# EAGLE board Doppler_LED_Controller-Panel (EAGLE 9.1.3), part 1 of 3
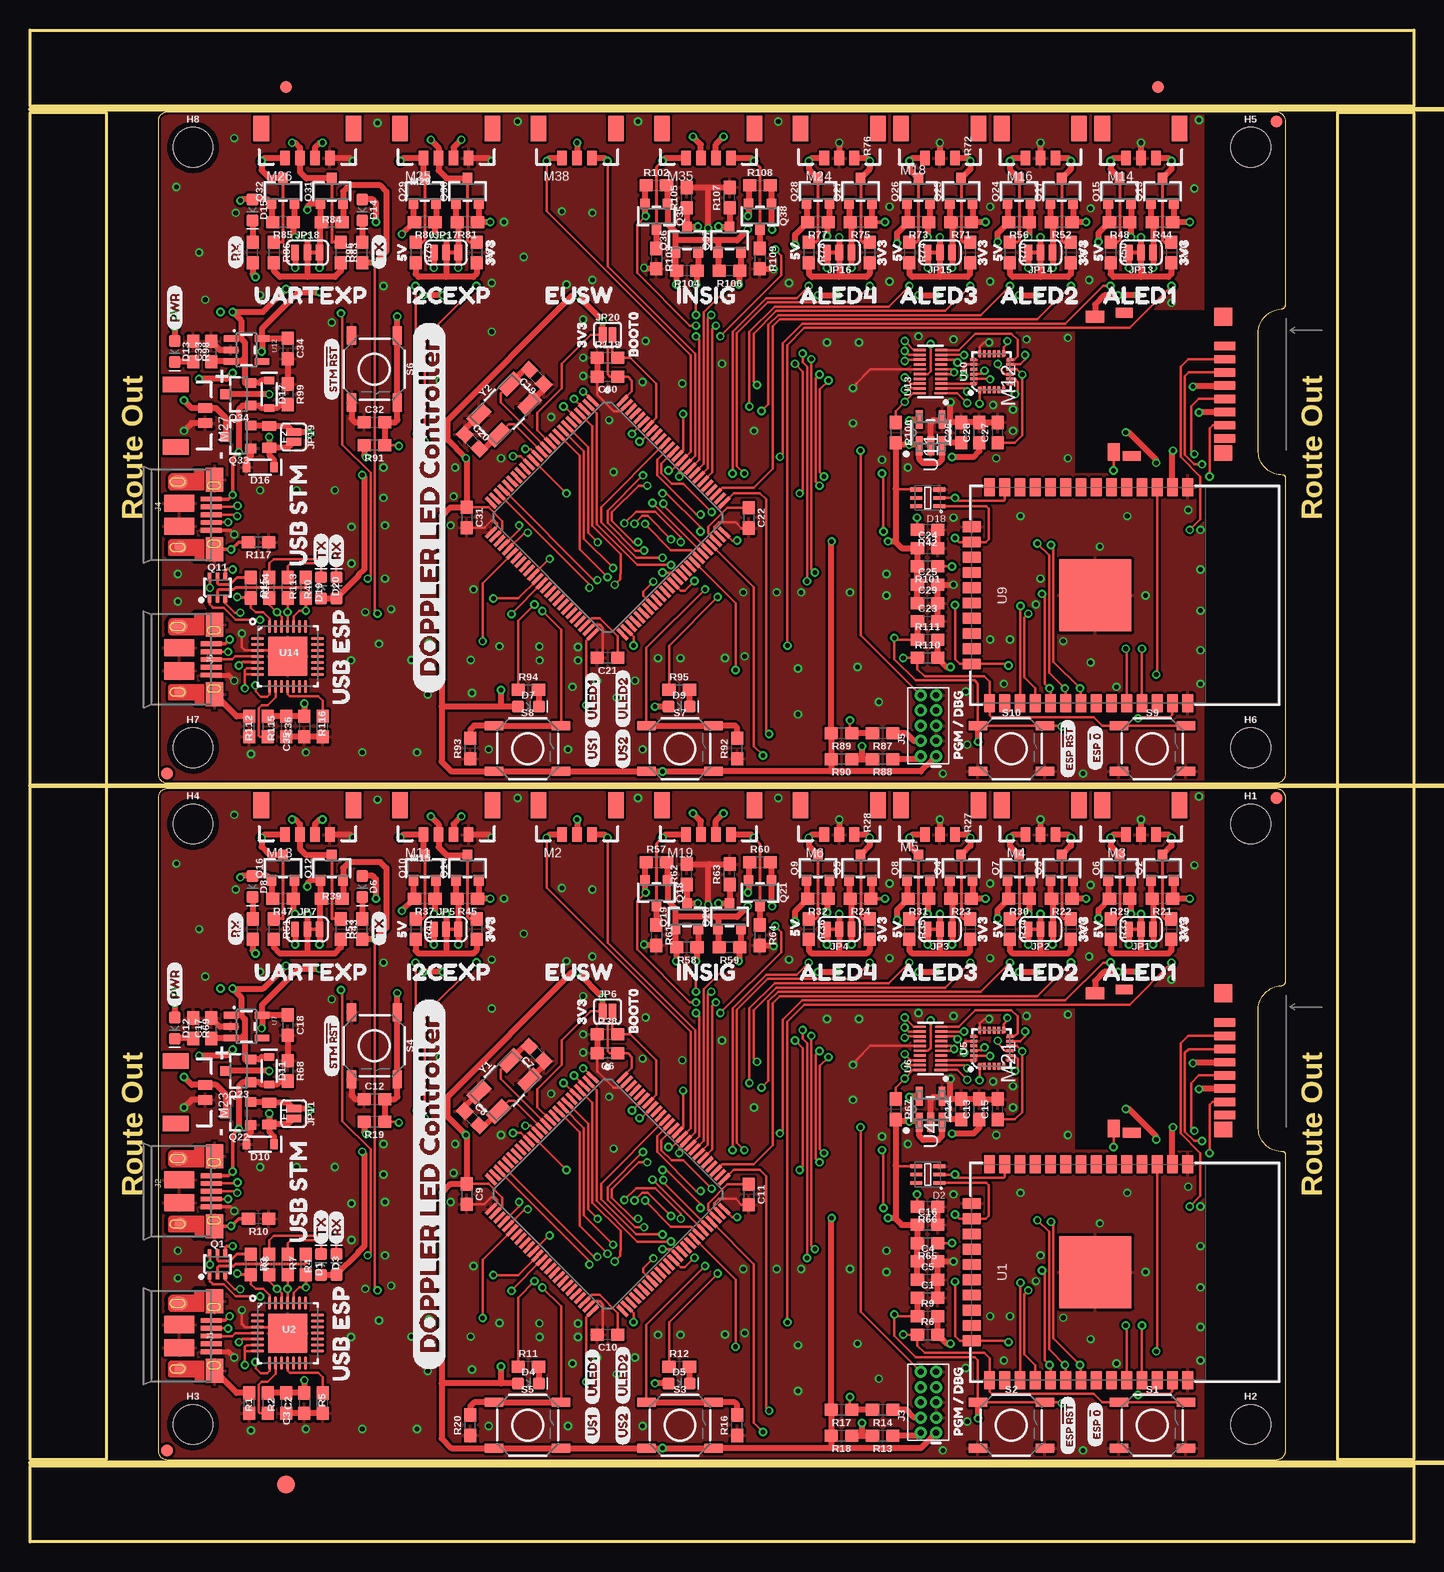
[diagram p0: board, top side]
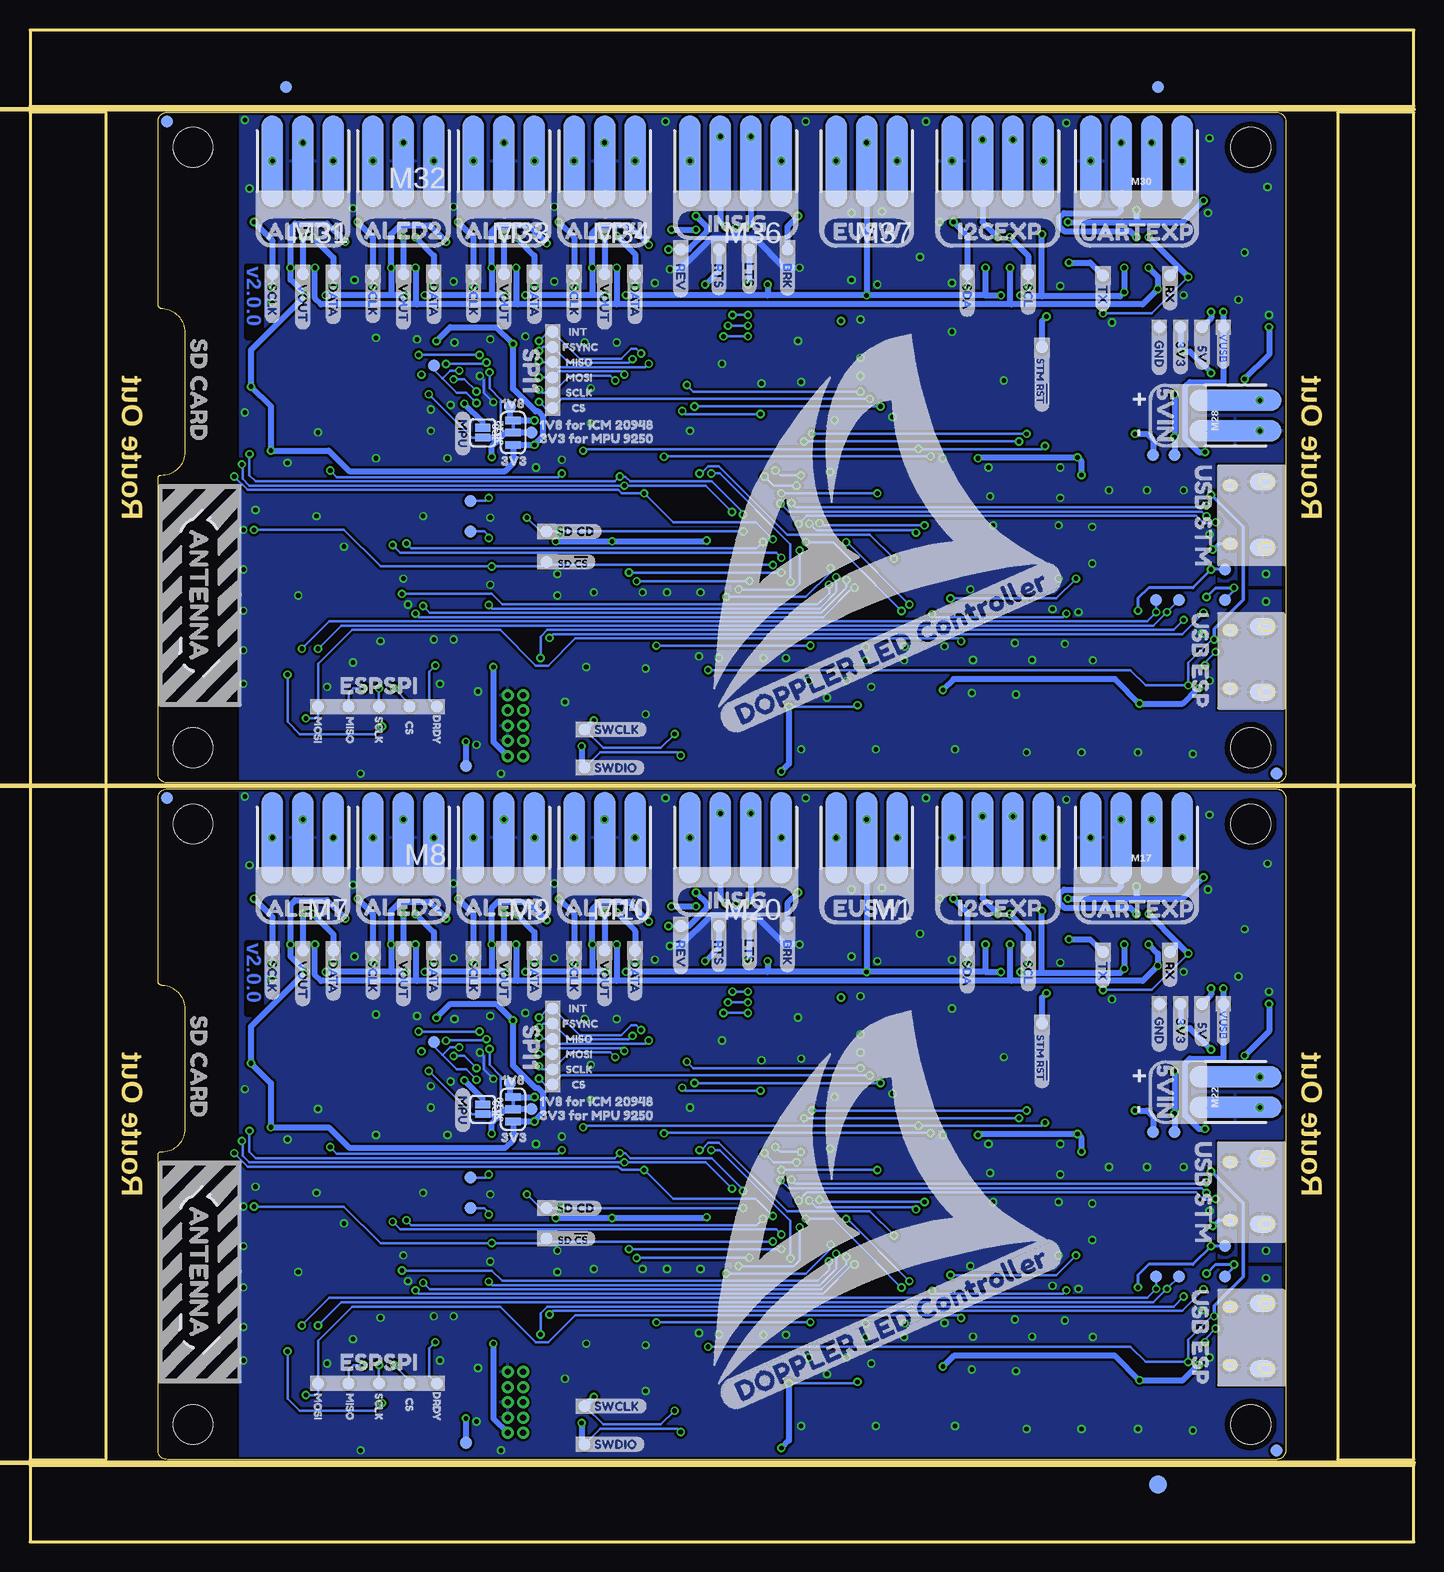
[diagram p1: board, bottom side, seen from below]

Size 115.32 x 125.98 mm. Coordinates in mm from the lower left corner, seen from the top.
Outline: 11.43,6.86 103.89,6.86 arc90 104.65,7.62 104.65,32.26 arc90 104.39,32.51 arc-90 102.36,34.42 102.36,44.2 arc-90 104.27,46.35 arc90 104.65,46.74 104.65,61.98 arc90 103.89,62.74 11.43,62.74 arc90 10.67,61.98 10.67,7.62 arc90 11.43,6.86
Outline: 11.43,63.25 103.89,63.25 arc90 104.65,64.01 104.65,88.65 arc90 104.39,88.9 arc-90 102.36,90.81 102.36,100.58 arc-90 104.27,102.74 arc90 104.65,103.12 104.65,118.36 arc90 103.89,119.13 11.43,119.13 arc90 10.67,118.36 10.67,64.01 arc90 11.43,63.25
Outline: 0,6.35 115.32,6.35 115.32,0 0,0 0,6.35
Outline: 108.97,119.13 115.32,119.13 115.32,6.86 108.97,6.86 108.97,119.13
Outline: 0,125.98 115.32,125.98 115.32,119.63 0,119.63 0,125.98
Outline: 0,119.13 6.35,119.13 6.35,6.86 0,6.86 0,119.13
Copper layers (1*16): Top 0.035mm / dielectric 1.5mm / Bottom 0.035mm
Design rules "SparkFun-2-layer-PCBWay-LIMIT": minimum track width 6mil, minimum drill 0.3mm, track to track 6mil, track to pad 6mil, pad to pad 6mil, via to via 6mil, smd to smd 6mil, copper to edge 6mil, drill to drill 6mil, minimum pad ring 6mil, minimum via ring 6mil, stop-mask expansion 4mil, vias tented up to drill 25mil, thermal gap 10mil
Milling: 3 lines

## Footprints (pad centres in the part's own frame; a part is rotated, then mirrored left to right if it is on the bottom)
0603 = smd 1.1 x 1: 1 -0.85,0; 2 0.85,0
LED-0603 = smd 1 x 1: A -0.877,0; C 0.877,0
APA102_2020_LONG = smd 1 x 0.3: 1DIN -0.95,0.7; 2CIN -0.95,0; 5COUT 0.95,0; 6DOUT 0.95,0.7 | smd 1 x 0.35: 3GND -0.95,-0.7; 4VCC 0.95,-0.7
SOD-323 = smd 0.63 x 0.83: A 1.15,0; C -1.15,0
FIDUCIAL-1X2 = smd 1 x 1: 1 0,0
FIDUCIAL-1.5X3 = smd 1.5 x 1.5: 1 0,0
0805 = smd 0.8 x 1.2: 1 -0.9,0; 2 0.9,0
STAND-OFF = hole 3.302: 0,0
USB-MICROB-PTH-MILL = smd 0.4 x 1.75: D+ 0,0; D- -0.65,0; GND 1.3,0; ID 0.65,0; VBUS -1.3,0 | smd 2 x 1.46: SHIELD -2.9,0.275; SHIELD2 2.9,0.275 | smd 1.425 x 2.5: SHIELD3 -0.963,-2.675; SHIELD4 0.963,-2.675 | smd 1.4 x 2.1 bottom: SHIELD5 -2.731,-2.531; SHIELD7 2.729,-2.531 | smd 1 x 1: SHIELD6 2.7,-2.575 | smd 1.1 x 1.5: SHIELD8 -2.731,-2.731 | smd 1 x 1.3 bottom: SHIELD9 -2.43,0.195; SHIELD10 2.43,0.195
2X5-PTH-1.27MM = drill 0.508 pad 1: 1 -2.54,-0.635; 2 -2.54,0.635; 3 -1.27,-0.635; 4 -1.27,0.635; 5 0,-0.635; 6 0,0.635; 7 1.27,-0.635; 8 1.27,0.635; 9 2.54,-0.635; 10 2.54,0.635
SMT-JUMPER_3_1-NC_TRACE_SILK = smd 0.635 x 1.27: 1 -1.016,0; 2 0,0; 3 1.016,0
SMT-JUMPER_2_NO_SILK = smd 0.635 x 1.27: 1 -0.406,0; 2 0.406,0
1X03_SMD_0.1IN = smd 1.778 x 7.62: P$1 -2.54,0; P$2 0,0; P$3 2.54,0
3_PIN_LOCK = smd 1.3 x 2.15: MOUNT0 -3.225,2.46; MOUNT1 3.225,2.46 | smd 0.8 x 1.2: P$1 -1.25,0; P$2 0,0; P$3 1.25,0
4_PIN_LOCK = smd 1.3 x 2.15: MOUNT0 -4.475,2.46; MOUNT1 3.225,2.46 | smd 0.8 x 1.2: P$1 -2.5,0; P$2 -1.25,0; P$3 0,0; P$4 1.25,0
SD_AMPHENOL_PUSH_PULL = smd 1.45 x 1: CD_SW1 -1.125,8.35 | smd 1 x 1.55: CD_SW2 10.15,9.925 | smd 1.3 x 1.5: NC_MOUNT1 -1.2,-0.75 | smd 1.5 x 1.5: NC_MOUNT2 10.15,-0.75 | smd 0.8 x 1.5: NC_MOUNT3 -1.475,6.85 | smd 0.8 x 1.4: NC_MOUNT4 10.475,7.5 | smd 0.7 x 1.75: P$1 7.7,-0.875; P$2 6.6,-0.875; P$3 5.5,-0.875; P$4 4.4,-0.875; P$5 3.3,-0.875; P$6 2.2,-0.875; P$7 1.1,-0.875; P$8 0,-0.875
1X04_SMD_0.1IN = smd 1.778 x 7.62: P$1 -3.81,0; P$2 -1.27,0; P$3 1.27,0; P$4 3.81,0
1X02_SMD_0.1IN = smd 1.778 x 7.62: P$1 -1.27,0; P$2 1.27,0
2_PIN_LOCK = smd 1.3 x 2.15: MOUNT0 -1.975,2.46; MOUNT1 3.225,2.46 | smd 0.8 x 1.2: P$2 0,0; P$3 1.25,0
SC70-6 = smd 0.3 x 0.66: 1 -0.65,-0.92; 2 0,-0.92; 3 0.65,-0.92; 4 0.65,0.92; 5 0,0.92; 6 -0.65,0.92
SOT23-3 = smd 0.8 x 0.9: 1 -0.95,-1; 2 0.95,-1; 3 0,1.1
TACTILE_SWITCH_SMD_5.2MM = smd 1.524 x 0.762: 1 -2.794,1.905; 2 2.794,1.905; 3 -2.794,-1.905; 4 2.794,-1.905
PAD.03X.04 = smd 1.016 x 1.016: P$1 0,0
ESP-WROOM-32 = smd 0.9 x 1.5: 1 7.7,9; 2 6.43,9; 3 5.16,9; 4 3.89,9; 5 2.62,9; 6 1.35,9; 7 0.08,9; 8 -1.19,9; 9 -2.46,9; 10 -3.73,9; 11 -5,9; 12 -6.27,9; 13 -7.54,9; 14 -8.81,9; 25 -8.81,-9; 26 -7.54,-9; 27 -6.27,-9; 28 -5,-9; 29 -3.73,-9; 30 -2.46,-9; 31 -1.19,-9; 32 0.08,-9; 33 1.35,-9; 34 2.62,-9; 35 3.89,-9; 36 5.16,-9; 37 6.43,-9; 38 7.7,-9 | smd 1.5 x 0.9: 15 -10.3,5.715; 16 -10.3,4.445; 17 -10.3,3.175; 18 -10.3,1.905; 19 -10.3,0.635; 20 -10.3,-0.635; 21 -10.3,-1.905; 22 -10.3,-3.175; 23 -10.3,-4.445; 24 -10.3,-5.715 | smd 6 x 6: GND 0,0
VQFN-28 = smd 1.1 x 0.25: 1 -2.5,1.5; 2 -2.5,1; 3 -2.5,0.5; 4 -2.5,0; 5 -2.5,-0.5; 6 -2.5,-1; 7 -2.5,-1.5; 15 2.5,-1.5; 16 2.5,-1; 17 2.5,-0.5; 18 2.5,0; 19 2.5,0.5; 20 2.5,1; 21 2.5,1.5 | smd 0.25 x 1.1: 8 -1.5,-2.5; 9 -1,-2.5; 10 -0.5,-2.5; 11 0,-2.5; 12 0.5,-2.5; 13 1,-2.5; 14 1.5,-2.5; 22 1.5,2.5; 23 1,2.5; 24 0.5,2.5; 25 0,2.5; 26 -0.5,2.5; 27 -1,2.5; 28 -1.5,2.5 | smd 3.25 x 3.25: PAD 0,0
LQFP-100 = smd 0.3 x 1.2: P$1 -6,-7.75; P$2 -5.5,-7.75; P$3 -5,-7.75; P$4 -4.5,-7.75; P$5 -4,-7.75; P$6 -3.5,-7.75; P$7 -3,-7.75; P$8 -2.5,-7.75; P$9 -2,-7.75; P$10 -1.5,-7.75; P$11 -1,-7.75; P$12 -0.5,-7.75; P$13 0,-7.75; P$14 0.5,-7.75; P$15 1,-7.75; P$16 1.5,-7.75; P$17 2,-7.75; P$18 2.5,-7.75; P$19 3,-7.75; P$20 3.5,-7.75; P$21 4,-7.75; P$22 4.5,-7.75; P$23 5,-7.75; P$24 5.5,-7.75; P$25 6,-7.75; P$51 6,7.75; P$52 5.5,7.75; P$53 5,7.75; P$54 4.5,7.75; P$55 4,7.75; P$56 3.5,7.75; P$57 3,7.75; P$58 2.5,7.75; P$59 2,7.75; P$60 1.5,7.75; P$61 1,7.75; P$62 0.5,7.75; P$63 0,7.75; P$64 -0.5,7.75; P$65 -1,7.75; P$66 -1.5,7.75; P$67 -2,7.75; P$68 -2.5,7.75; P$69 -3,7.75; P$70 -3.5,7.75; P$71 -4,7.75; P$72 -4.5,7.75; P$73 -5,7.75; P$74 -5.5,7.75; P$75 -6,7.75 | smd 1.2 x 0.3: P$26 7.75,-6; P$27 7.75,-5.5; P$28 7.75,-5; P$29 7.75,-4.5; P$30 7.75,-4; P$31 7.75,-3.5; P$32 7.75,-3; P$33 7.75,-2.5; P$34 7.75,-2; P$35 7.75,-1.5; P$36 7.75,-1; P$37 7.75,-0.5; P$38 7.75,0; P$39 7.75,0.5; P$40 7.75,1; P$41 7.75,1.5; P$42 7.75,2; P$43 7.75,2.5; P$44 7.75,3; P$45 7.75,3.5; P$46 7.75,4; P$47 7.75,4.5; P$48 7.75,5; P$49 7.75,5.5; P$50 7.75,6; P$76 -7.75,6; P$77 -7.75,5.5; P$78 -7.75,5; P$79 -7.75,4.5; P$80 -7.75,4; P$81 -7.75,3.5; P$82 -7.75,3; P$83 -7.75,2.5; P$84 -7.75,2; P$85 -7.75,1.5; P$86 -7.75,1; P$87 -7.75,0.5; P$88 -7.75,0; P$89 -7.75,-0.5; P$90 -7.75,-1; P$91 -7.75,-1.5; P$92 -7.75,-2; P$93 -7.75,-2.5; P$94 -7.75,-3; P$95 -7.75,-3.5; P$96 -7.75,-4; P$97 -7.75,-4.5; P$98 -7.75,-5; P$99 -7.75,-5.5; P$100 -7.75,-6
DDC5 = smd 1.575 x 0.559: 1 -1.092,0.95; 2 -1.092,0; 3 -1.092,-0.95; 4 1.092,-0.95; 5 1.092,0.95
QFN24-3X3 = smd 0.495 x 0.25: 1 -1.552,1; 6 -1.552,-1; 13 1.552,-1; 18 1.552,1 | smd 0.6 x 0.25: 2 -1.5,0.6; 3 -1.5,0.2; 4 -1.5,-0.2; 5 -1.5,-0.6; 14 1.5,-0.6; 15 1.5,-0.2; 16 1.5,0.2; 17 1.5,0.6 | smd 0.25 x 0.495: 7 -1,-1.552; 12 1,-1.552; 19 1,1.552; 24 -1,1.552 | smd 0.25 x 0.6: 8 -0.6,-1.5; 9 -0.2,-1.5; 10 0.2,-1.5; 11 0.6,-1.5; 20 0.6,1.5; 21 0.2,1.5; 22 -0.2,1.5; 23 -0.6,1.5
UFDFN-20 = smd 0.2 x 1.1: 1 -1.8,-0.85 | smd 0.2 x 1: 2 -1.4,-0.9; 3 -1,-0.9; 4 -0.6,-0.9; 5 -0.2,-0.9; 6 0.2,-0.9; 7 0.6,-0.9; 8 1,-0.9; 9 1.4,-0.9; 10 1.8,-0.9; 11 1.8,0.9; 12 1.4,0.9; 13 1,0.9; 14 0.6,0.9; 15 0.2,0.9; 16 -0.2,0.9; 17 -0.6,0.9; 18 -1,0.9; 19 -1.4,0.9; 20 -1.8,0.9
SOT23-5 = smd 0.55 x 1.2: 1 -0.95,-1.3; 2 0,-1.3; 3 0.95,-1.3; 4 0.95,1.3; 5 -0.95,1.3
CRYSTAL-SMD-5X3.2-4PAD = smd 1.9 x 1.1: 1 -1.85,-1.15; 2 1.85,-1.15; 3 1.85,1.15; 4 -1.85,1.15

## Placement (x,y rotation side)
C1  0.1uF  [0603]  74.8,20.32 0 top
C2  2.2uF  [0603]  21.34,11.56 270 top
C3  0.1uF  [0603]  22.86,11.56 270 top
C4  0.1uF  [0603]  74.8,23.37 0 top
C5  10uF  [0603]  74.8,21.84 0 top
C6  0.1uF  [0603]  48.13,40.72 180 top
C7  18pF  [0603]  42.22,40.68 135 top
C8  18pF  [0603]  36.83,35.29 315 top
C9  10uF  [0603]  36.39,28.97 270 top
C10  2.2uF  [0603]  48.13,17.27 180 top
C11  2.2uF  [0603]  59.88,28.94 270 top
C12  0.1uF  [0603]  28.7,36.89 0 top
C13  0.1uF  [0603]  79.12,36.04 90 top
C14  0.1uF  [0603]  77.6,36.04 90 top
C15  0.1uF  [0603]  80.65,36.04 90 top
C16  0.1uF  [0603]  74.8,26.42 0 top
C17  2.2uF  [0603]  15.11,42.8 90 top
C18  2.2uF  [0603]  21.46,43.05 270 top
C19  18pF  [0603]  42.22,97.07 135 top
C20  18pF  [0603]  36.83,91.68 315 top
C21  2.2uF  [0603]  48.13,73.66 180 top
C22  2.2uF  [0603]  59.88,85.33 270 top
C23  0.1uF  [0603]  74.8,76.71 0 top
C24  0.1uF  [0603]  74.8,82.8 0 top
C25  0.1uF  [0603]  74.8,79.76 0 top
C26  0.1uF  [0603]  77.6,92.43 90 top
C27  0.1uF  [0603]  80.65,92.43 90 top
C28  0.1uF  [0603]  79.12,92.43 90 top
C29  10uF  [0603]  74.8,78.23 0 top
C30  0.1uF  [0603]  48.13,97.1 180 top
C31  10uF  [0603]  36.39,85.36 270 top
C32  0.1uF  [0603]  28.7,93.28 0 top
C33  2.2uF  [0603]  15.11,99.19 90 top
C34  2.2uF  [0603]  21.46,99.44 270 top
C35  0.1uF  [0603]  22.86,67.95 270 top
C36  2.2uF  [0603]  21.34,67.95 270 top
D1  ESPTX-GREEN  [LED-0603]  24.26,23.11 90 top
D2  ESP_STAT  [APA102_2020_LONG]  74.8,30.61 180 top
D3  ESPRX-YELLOW  [LED-0603]  25.53,23.11 90 top
D4  ULED1-BLUE  [LED-0603]  41.53,13.21 0 top
D5  ULED2-WHITE  [LED-0603]  54.1,13.21 0 top
D6  U7TX-GREEN  [LED-0603]  27.69,54.61 270 top
D7  ULED1-BLUE  [LED-0603]  41.53,69.6 0 top
D8  U7RX-YELLOW  [LED-0603]  18.54,54.61 270 top
D9  ULED2-WHITE  [LED-0603]  54.1,69.6 0 top
D10  5.6V  [SOD-323]  19.18,33.15 180 top
D11  3A/10V/280mV  [SOD-323]  19.94,39.24 270 top
D12  PWR-RED  [LED-0603]  12.06,42.8 270 top
D13  PWR-RED  [LED-0603]  12.06,99.19 270 top
D14  U7TX-GREEN  [LED-0603]  27.69,111 270 top
D15  U7RX-YELLOW  [LED-0603]  18.54,111 270 top
D16  5.6V  [SOD-323]  19.18,89.54 180 top
D17  3A/10V/280mV  [SOD-323]  19.94,95.63 270 top
D18  ESP_STAT  [APA102_2020_LONG]  74.8,87 180 top
D19  ESPTX-GREEN  [LED-0603]  24.26,79.5 90 top
D20  ESPRX-YELLOW  [LED-0603]  25.53,79.5 90 top
E$1  [FIDUCIAL-1X2]  21.34,121.22 0 top
E$2  [FIDUCIAL-1X2]  21.34,121.22 0 bottom
E$3  [FIDUCIAL-1X2]  93.98,121.22 0 top
E$4  [FIDUCIAL-1X2]  93.98,121.22 0 bottom
E$5  [FIDUCIAL-1.5X3]  21.34,4.76 0 top
E$6  [FIDUCIAL-1.5X3]  21.34,4.76 0 bottom
F1  PPTC_6V500MA  [0805]  19.94,35.69 270 top
F2  PPTC_6V500MA  [0805]  19.94,92.08 270 top
FD1  FIDUCIAL1X2  [FIDUCIAL-1X2]  11.43,7.62 0 top
FD2  FIDUCIAL1X2  [FIDUCIAL-1X2]  103.89,61.98 0 top
FD3  FIDUCIAL1X2  [FIDUCIAL-1X2]  11.43,7.62 0 bottom
FD4  FIDUCIAL1X2  [FIDUCIAL-1X2]  103.89,61.98 0 bottom
FD5  FIDUCIAL1X2  [FIDUCIAL-1X2]  11.43,64.01 0 top
FD6  FIDUCIAL1X2  [FIDUCIAL-1X2]  103.89,118.36 0 top
FD7  FIDUCIAL1X2  [FIDUCIAL-1X2]  11.43,64.01 0 bottom
FD8  FIDUCIAL1X2  [FIDUCIAL-1X2]  103.89,118.36 0 bottom
H1  STAND-OFF  [STAND-OFF]  101.73,59.82 0 top
H2  STAND-OFF  [STAND-OFF]  101.73,9.78 0 top
H3  STAND-OFF  [STAND-OFF]  13.59,9.78 0 top
H4  STAND-OFF  [STAND-OFF]  13.59,59.82 0 top
H5  STAND-OFF  [STAND-OFF]  101.73,116.2 0 top
H6  STAND-OFF  [STAND-OFF]  101.73,66.17 0 top
H7  STAND-OFF  [STAND-OFF]  13.59,66.17 0 top
H8  STAND-OFF  [STAND-OFF]  13.59,116.2 0 top
J1  [USB-MICROB-PTH-MILL]  15.11,17.14 270 top
J2  [USB-MICROB-PTH-MILL]  15.11,29.21 270 top
J3  CORTEX_DEBUG_PTH  [2X5-PTH-1.27MM]  74.87,11.62 90 top
J4  [USB-MICROB-PTH-MILL]  15.11,85.6 270 top
J5  CORTEX_DEBUG_PTH  [2X5-PTH-1.27MM]  74.87,68.01 90 top
J6  [USB-MICROB-PTH-MILL]  15.11,73.53 270 top
JP1  ALED1_VOUT_SEL  [SMT-JUMPER_3_1-NC_TRACE_SILK]  92.58,51.05 180 top
JP2  ALED2_VOUT_SEL  [SMT-JUMPER_3_1-NC_TRACE_SILK]  84.2,51.05 180 top
JP3  ALED3_VOUT_SEL  [SMT-JUMPER_3_1-NC_TRACE_SILK]  75.82,51.05 180 top
JP4  ALED4_VOUT_SEL  [SMT-JUMPER_3_1-NC_TRACE_SILK]  67.44,51.05 180 top
JP5  I2C1_VOUT_SEL  [SMT-JUMPER_3_1-NC_TRACE_SILK]  34.67,51.05 0 top
JP6  JUMPER-SMT_2_NO_SILK  [SMT-JUMPER_2_NO_SILK]  48.13,44.2 0 top
JP7  I2C1_VOUT_SEL  [SMT-JUMPER_3_1-NC_TRACE_SILK]  23.11,51.05 0 top
JP8  IMU_VSEL  [SMT-JUMPER_3_1-NC_TRACE_SILK]  75.06,92.43 90 bottom
JP9  IMU_VSEL  [SMT-JUMPER_3_1-NC_TRACE_SILK]  75.06,36.04 90 bottom
JP10  MPU9250  [SMT-JUMPER_2_NO_SILK]  77.6,36.04 270 bottom
JP11  DEFUSE  [SMT-JUMPER_2_NO_SILK]  21.97,35.69 270 top
JP12  MPU9250  [SMT-JUMPER_2_NO_SILK]  77.6,92.43 270 bottom
JP13  ALED1_VOUT_SEL  [SMT-JUMPER_3_1-NC_TRACE_SILK]  92.58,107.44 180 top
JP14  ALED2_VOUT_SEL  [SMT-JUMPER_3_1-NC_TRACE_SILK]  84.2,107.44 180 top
JP15  ALED3_VOUT_SEL  [SMT-JUMPER_3_1-NC_TRACE_SILK]  75.82,107.44 180 top
JP16  ALED4_VOUT_SEL  [SMT-JUMPER_3_1-NC_TRACE_SILK]  67.44,107.44 180 top
JP17  I2C1_VOUT_SEL  [SMT-JUMPER_3_1-NC_TRACE_SILK]  34.67,107.44 0 top
JP18  I2C1_VOUT_SEL  [SMT-JUMPER_3_1-NC_TRACE_SILK]  23.11,107.44 0 top
JP19  DEFUSE  [SMT-JUMPER_2_NO_SILK]  21.97,92.08 270 top
JP20  JUMPER-SMT_2_NO_SILK  [SMT-JUMPER_2_NO_SILK]  48.13,100.58 0 top
M1  EXT_SWTCH  [1X03_SMD_0.1IN]  45.59,58.67 180 bottom
M2  EXT_SWTCH  [3_PIN_LOCK]  45.59,58.93 0 top
M3  ALED1_LOCK  [3_PIN_LOCK]  92.58,58.93 0 top
M4  ALED2_LOCK  [3_PIN_LOCK]  84.2,58.93 0 top
M5  ALED3_LOCK  [3_PIN_LOCK]  75.82,58.93 0 top
M6  ALED4_LOCK  [3_PIN_LOCK]  67.44,58.93 0 top
M7  ALED1_SMD  [1X03_SMD_0.1IN]  92.58,58.67 180 bottom
M8  ALED2_SMD  [1X03_SMD_0.1IN]  84.2,58.67 180 bottom
M9  ALED3_SMD  [1X03_SMD_0.1IN]  75.82,58.67 180 bottom
M10  ALED4_SMD  [1X03_SMD_0.1IN]  67.44,58.67 180 bottom
M11  I2C1_LOCK  [4_PIN_LOCK]  35.31,58.93 0 top
M12  SD  [SD_AMPHENOL_PUSH_PULL]  98.68,91.95 90 top
M13  U7_LOCK  [4_PIN_LOCK]  23.75,58.93 0 top
M14  ALED1_LOCK  [3_PIN_LOCK]  92.58,115.32 0 top
M15  I2C1_SMD  [1X04_SMD_0.1IN]  34.67,58.67 180 bottom
M16  ALED2_LOCK  [3_PIN_LOCK]  84.2,115.32 0 top
M17  U7_SMD  [1X04_SMD_0.1IN]  23.11,58.67 180 bottom
M18  ALED3_LOCK  [3_PIN_LOCK]  75.82,115.32 0 top
M19  SIG_IN_LOCK  [4_PIN_LOCK]  57.15,58.93 0 top
M20  SIG_IN_SMD  [1X04_SMD_0.1IN]  56.52,58.67 180 bottom
M21  SD  [SD_AMPHENOL_PUSH_PULL]  98.68,35.56 90 top
M22  [1X02_SMD_0.1IN]  14.86,37.46 90 bottom
M23  [2_PIN_LOCK]  14.6,36.83 90 top
M24  ALED4_LOCK  [3_PIN_LOCK]  67.44,115.32 0 top
M25  I2C1_LOCK  [4_PIN_LOCK]  35.31,115.32 0 top
M26  U7_LOCK  [4_PIN_LOCK]  23.75,115.32 0 top
M27  [2_PIN_LOCK]  14.6,93.22 90 top
M28  [1X02_SMD_0.1IN]  14.86,93.85 90 bottom
M29  I2C1_SMD  [1X04_SMD_0.1IN]  34.67,115.06 180 bottom
M30  U7_SMD  [1X04_SMD_0.1IN]  23.11,115.06 180 bottom
M31  ALED1_SMD  [1X03_SMD_0.1IN]  92.58,115.06 180 bottom
M32  ALED2_SMD  [1X03_SMD_0.1IN]  84.2,115.06 180 bottom
M33  ALED3_SMD  [1X03_SMD_0.1IN]  75.82,115.06 180 bottom
M34  ALED4_SMD  [1X03_SMD_0.1IN]  67.44,115.06 180 bottom
M35  SIG_IN_LOCK  [4_PIN_LOCK]  57.15,115.32 0 top
M36  SIG_IN_SMD  [1X04_SMD_0.1IN]  56.52,115.06 180 bottom
M37  EXT_SWTCH  [1X03_SMD_0.1IN]  45.59,115.06 180 bottom
M38  EXT_SWTCH  [3_PIN_LOCK]  45.59,115.32 0 top
Q1  [SC70-6]  15.62,23.11 0 top
Q2  [SOT23-3]  94.36,56.13 0 top
Q3  [SOT23-3]  85.98,56.13 0 top
Q4  [SOT23-3]  77.6,56.13 0 top
Q5  [SOT23-3]  69.22,56.13 0 top
Q6  [SOT23-3]  90.81,56.13 0 top
Q7  [SOT23-3]  82.42,56.13 0 top
Q8  [SOT23-3]  74.04,56.13 0 top
Q9  [SOT23-3]  65.66,56.13 0 top
Q10  [SOT23-3]  32.89,56.13 0 top
Q11  [SC70-6]  15.62,79.5 0 top
Q12  [SOT23-3]  25.15,56.13 0 top
Q13  [SOT23-3]  94.36,112.52 0 top
Q14  [SOT23-3]  36.45,56.13 0 top
Q15  [SOT23-3]  90.81,112.52 0 top
Q16  [SOT23-3]  21.08,56.13 0 top
Q17  [SOT23-3]  85.98,112.52 0 top
Q18  [SOT23-3]  52.2,54.1 180 top
Q19  [SOT23-3]  54.74,52.07 0 top
Q20  [SOT23-3]  58.29,52.07 0 top
Q21  [SOT23-3]  60.83,54.1 180 top
Q22  4.3A/20V/54mΩ  [SOT23-3]  17.4,35.69 90 top
Q23  4.3A/20V/54mΩ  [SOT23-3]  17.4,39.24 90 top
Q24  [SOT23-3]  82.42,112.52 0 top
Q25  [SOT23-3]  77.6,112.52 0 top
Q26  [SOT23-3]  74.04,112.52 0 top
Q27  [SOT23-3]  69.22,112.52 0 top
Q28  [SOT23-3]  65.66,112.52 0 top
Q29  [SOT23-3]  32.89,112.52 0 top
Q30  [SOT23-3]  36.45,112.52 0 top
Q31  [SOT23-3]  25.15,112.52 0 top
Q32  [SOT23-3]  21.08,112.52 0 top
Q33  4.3A/20V/54mΩ  [SOT23-3]  17.4,92.08 90 top
Q34  4.3A/20V/54mΩ  [SOT23-3]  17.4,95.63 90 top
Q35  [SOT23-3]  52.2,110.49 180 top
Q36  [SOT23-3]  54.74,108.46 0 top
Q37  [SOT23-3]  58.29,108.46 0 top
Q38  [SOT23-3]  60.83,110.49 180 top
R1  DNP  [0603]  18.29,11.56 90 top
R2  1k  [0603]  19.81,11.56 270 top
R3  10k  [0603]  18.41,23.11 270 top
R4  10k  [0603]  22.99,23.11 270 top
R5  10k  [0603]  24.38,11.56 90 top
R6  10k  [0603]  74.8,17.27 0 top
R7  1k  [0603]  21.46,23.11 90 top
R8  1k  [0603]  19.94,23.11 90 top
R9  10k  [0603]  74.8,18.8 0 top
R10  DNP  [0603]  19.05,26.92 180 top
R11  1k  [0603]  41.53,14.61 0 top
R12  1k  [0603]  54.1,14.61 0 top
R13  20  [0603]  71.06,8.83 180 top
R14  20  [0603]  71.06,10.99 180 top
R15  10k  [0603]  18.41,79.5 270 top
R16  10k  [0603]  58.93,9.72 90 top
R17  10k  [0603]  67.63,10.99 180 top
R18  10k  [0603]  67.63,8.83 180 top
R19  10k  [0603]  28.7,34.99 180 top
R20  10k  [0603]  36.7,9.72 90 top
R21  10k  [0603]  94.36,53.59 180 top
R22  10k  [0603]  85.98,53.59 180 top
R23  10k  [0603]  77.6,53.59 180 top
R24  10k  [0603]  69.22,53.59 180 top
R25  10k  [0603]  95.12,51.05 270 top
R26  10k  [0603]  86.74,51.05 270 top
R27  10k  [0603]  78.36,51.05 270 top
R28  10k  [0603]  69.98,51.05 270 top
R29  10k  [0603]  90.81,53.59 180 top
R30  10k  [0603]  82.42,53.59 180 top
R31  10k  [0603]  74.04,53.59 180 top
R32  10k  [0603]  65.66,53.59 180 top
R33  10k  [0603]  90.04,51.05 270 top
R34  10k  [0603]  81.66,51.05 270 top
R35  10k  [0603]  73.28,51.05 270 top
R36  10k  [0603]  64.9,51.05 270 top
R37  2.2k  [0603]  32.89,53.59 180 top
R38  10k  [0603]  48.13,42.29 0 top
R39  10k  [0603]  25.15,53.59 180 top
R40  10k  [0603]  22.99,79.5 270 top
R41  2.2k  [0603]  32.13,51.05 270 top
R42  10k  [0603]  74.8,84.33 180 top
R43  10k  [0603]  25.91,51.05 270 top
R44  10k  [0603]  94.36,109.98 180 top
R45  2.2k  [0603]  36.45,53.59 180 top
R46  10k  [0603]  95.12,107.44 270 top
R47  10k  [0603]  21.08,53.59 180 top
R48  10k  [0603]  90.81,109.98 180 top
R49  2.2k  [0603]  37.21,51.05 270 top
R50  10k  [0603]  90.04,107.44 270 top
R51  10k  [0603]  20.32,51.05 270 top
R52  10k  [0603]  85.98,109.98 180 top
R53  1k  [0603]  27.69,51.05 90 top
R54  10k  [0603]  86.74,107.44 270 top
R55  1k  [0603]  18.54,51.05 90 top
R56  10k  [0603]  82.42,109.98 180 top
R57  10k  [0603]  52.2,56.64 0 top
R58  10k  [0603]  54.74,49.53 180 top
R59  10k  [0603]  58.29,49.53 180 top
R60  10k  [0603]  60.83,56.64 0 top
R61  10k  [0603]  52.2,50.55 270 top
R62  10k  [0603]  54.74,55.63 90 top
R63  10k  [0603]  58.29,55.63 90 top
R64  10k  [0603]  60.83,50.55 270 top
R65  10k  [0603]  74.8,24.89 180 top
R66  10k  [0603]  74.8,27.94 180 top
R67  10k  [0603]  72.14,36.04 270 top
R68  10k  [0603]  21.46,39.24 270 top
R69  1k  [0603]  13.59,42.8 270 top
R70  10k  [0603]  81.66,107.44 270 top
R71  10k  [0603]  77.6,109.98 180 top
R72  10k  [0603]  78.36,107.44 270 top
R73  10k  [0603]  74.04,109.98 180 top
R74  10k  [0603]  73.28,107.44 270 top
R75  10k  [0603]  69.22,109.98 180 top
R76  10k  [0603]  69.98,107.44 270 top
R77  10k  [0603]  65.66,109.98 180 top
R78  10k  [0603]  64.9,107.44 270 top
R79  2.2k  [0603]  32.13,107.44 270 top
R80  2.2k  [0603]  32.89,109.98 180 top
R81  2.2k  [0603]  36.45,109.98 180 top
R82  2.2k  [0603]  37.21,107.44 270 top
R83  10k  [0603]  25.91,107.44 270 top
R84  10k  [0603]  25.15,109.98 180 top
R85  10k  [0603]  21.08,109.98 180 top
R86  10k  [0603]  20.32,107.44 270 top
R87  20  [0603]  71.06,67.37 180 top
R88  20  [0603]  71.06,65.21 180 top
R89  10k  [0603]  67.63,67.37 180 top
R90  10k  [0603]  67.63,65.21 180 top
R91  10k  [0603]  28.7,91.38 180 top
R92  10k  [0603]  58.93,66.1 90 top
R93  10k  [0603]  36.7,66.1 90 top
R94  1k  [0603]  41.53,70.99 0 top
R95  1k  [0603]  54.1,70.99 0 top
R96  1k  [0603]  27.69,107.44 90 top
R97  1k  [0603]  18.54,107.44 90 top
R98  1k  [0603]  13.59,99.19 270 top
R99  10k  [0603]  21.46,95.63 270 top
R100  10k  [0603]  72.14,92.43 270 top
R101  10k  [0603]  74.8,81.28 180 top
R102  10k  [0603]  52.2,113.03 0 top
R103  10k  [0603]  52.2,106.93 270 top
R104  10k  [0603]  54.74,105.92 180 top
R105  10k  [0603]  54.74,112.01 90 top
R106  10k  [0603]  58.29,105.92 180 top
R107  10k  [0603]  58.29,112.01 90 top
R108  10k  [0603]  60.83,113.03 0 top
R109  10k  [0603]  60.83,106.93 270 top
R110  10k  [0603]  74.8,73.66 0 top
R111  10k  [0603]  74.8,75.18 0 top
R112  DNP  [0603]  18.29,67.95 90 top
R113  1k  [0603]  21.46,79.5 90 top
R114  1k  [0603]  19.94,79.5 90 top
R115  1k  [0603]  19.81,67.95 270 top
R116  10k  [0603]  24.38,67.95 90 top
R117  DNP  [0603]  19.05,83.31 180 top
R118  10k  [0603]  48.13,98.68 0 top
S1  US2  [TACTILE_SWITCH_SMD_5.2MM]  93.54,9.72 0 top
S2  US2  [TACTILE_SWITCH_SMD_5.2MM]  81.79,9.72 0 top
S3  US2  [TACTILE_SWITCH_SMD_5.2MM]  54.17,9.72 0 top
S4  STM_!RST  [TACTILE_SWITCH_SMD_5.2MM]  28.7,41.34 270 top
S5  US1  [TACTILE_SWITCH_SMD_5.2MM]  41.47,9.72 0 top
S6  STM_!RST  [TACTILE_SWITCH_SMD_5.2MM]  28.7,97.73 270 top
S7  US2  [TACTILE_SWITCH_SMD_5.2MM]  54.17,66.1 0 top
S8  US1  [TACTILE_SWITCH_SMD_5.2MM]  41.47,66.1 0 top
S9  US2  [TACTILE_SWITCH_SMD_5.2MM]  93.54,66.1 0 top
S10  US2  [TACTILE_SWITCH_SMD_5.2MM]  81.79,66.1 0 top
TP1  EDRDY  [PAD.03X.04]  81.41,13.21 0 bottom
TP2  ERX0  [PAD.03X.04]  19.56,78.49 0 bottom
TP3  ERX0  [PAD.03X.04]  19.56,22.1 0 bottom
TP4  ETX0  [PAD.03X.04]  21.46,22.1 0 bottom
TP5  E!RTS  [PAD.03X.04]  15.75,24.64 0 bottom
TP6  E!DTR  [PAD.03X.04]  15.75,22.1 0 bottom
TP7  EMOSI  [PAD.03X.04]  91.31,13.21 0 bottom
TP8  EMISO  [PAD.03X.04]  88.77,13.21 0 bottom
TP9  ESCLK  [PAD.03X.04]  86.23,13.21 0 bottom
TP10  ECS  [PAD.03X.04]  83.69,13.21 0 bottom
TP11  ESSI  [PAD.03X.04]  78.61,27.81 0 bottom
TP12  ESSCK  [PAD.03X.04]  78.61,30.35 0 bottom
TP13  E!RST  [PAD.03X.04]  78.99,8.25 0 bottom
TP14  ETX0  [PAD.03X.04]  21.46,78.49 0 bottom
TP15  E!RTS  [PAD.03X.04]  15.75,81.03 0 bottom
TP16  E!DTR  [PAD.03X.04]  15.75,78.49 0 bottom
TP17  VDDIO  [PAD.03X.04]  73.53,36.07 0 bottom
TP18  1V8  [PAD.03X.04]  75.31,38.23 0 bottom
TP19  EMOSI  [PAD.03X.04]  91.31,69.6 0 bottom
TP20  S1Si  [PAD.03X.04]  71.75,40.64 0 bottom
TP21  S1SO  [PAD.03X.04]  71.75,41.91 0 bottom
TP22  S1SCLk  [PAD.03X.04]  71.75,39.37 0 bottom
TP23  CSSD  [PAD.03X.04]  72.26,25.27 270 bottom
TP24  CSIMU  [PAD.03X.04]  71.75,38.1 0 bottom
TP25  SDCD  [PAD.03X.04]  72.26,27.81 270 bottom
TP26  EMISO  [PAD.03X.04]  88.77,69.6 0 bottom
TP27  ESCLK  [PAD.03X.04]  86.23,69.6 0 bottom
TP28  ECS  [PAD.03X.04]  83.69,69.6 0 bottom
TP29  CSIMUIO  [PAD.03X.04]  81.66,41.66 0 bottom
TP30  IMUINT  [PAD.03X.04]  71.75,44.45 0 bottom
TP31  IMUFS  [PAD.03X.04]  71.75,43.18 0 bottom
TP32  ESSI  [PAD.03X.04]  78.61,84.2 0 bottom
TP33  ESSCK  [PAD.03X.04]  78.61,86.74 0 bottom
TP34  AL1D  [PAD.03X.04]  90.04,49.28 0 bottom
TP35  AL2D  [PAD.03X.04]  81.66,49.28 0 bottom
TP36  AL3D  [PAD.03X.04]  73.28,49.28 0 bottom
TP37  AL4D  [PAD.03X.04]  64.9,49.28 0 bottom
TP38  AL1V  [PAD.03X.04]  92.58,49.28 0 bottom
TP39  AL2V  [PAD.03X.04]  84.2,49.28 0 bottom
TP40  AL3V  [PAD.03X.04]  75.82,49.28 0 bottom
TP41  AL4V  [PAD.03X.04]  67.44,49.28 0 bottom
TP42  AL1C  [PAD.03X.04]  95.12,49.28 0 bottom
TP43  AL2C  [PAD.03X.04]  86.74,49.28 0 bottom
TP44  AL3C  [PAD.03X.04]  78.36,49.28 0 bottom
TP45  AL4C  [PAD.03X.04]  69.98,49.28 0 bottom
TP46  E!RST  [PAD.03X.04]  78.99,64.64 0 bottom
TP47  VRPP  [PAD.03X.04]  21.72,34.16 270 bottom
TP48  VOVP  [PAD.03X.04]  19.94,34.16 270 bottom
TP49  VUSB  [PAD.03X.04]  15.88,44.83 270 bottom
TP50  5V  [PAD.03X.04]  17.65,44.83 270 bottom
TP51  3V3  [PAD.03X.04]  19.43,44.83 270 bottom
TP52  GND  [PAD.03X.04]  21.21,44.83 270 bottom
TP53  IIC1SDA  [PAD.03X.04]  37.21,49.28 0 bottom
TP54  IIC1SCL  [PAD.03X.04]  32.13,49.28 0 bottom
TP55  S1Si  [PAD.03X.04]  71.75,97.03 0 bottom
TP56  S1SO  [PAD.03X.04]  71.75,98.3 0 bottom
TP57  U7TX  [PAD.03X.04]  25.91,49.15 0 bottom
TP58  U7RX  [PAD.03X.04]  20.32,49.15 0 bottom
TP59  S1SCLk  [PAD.03X.04]  71.75,95.76 0 bottom
TP60  CSSD  [PAD.03X.04]  72.26,81.66 270 bottom
TP61  CSIMU  [PAD.03X.04]  71.75,94.49 0 bottom
TP62  STMR  [PAD.03X.04]  30.99,43.18 0 bottom
TP63  VDDIO  [PAD.03X.04]  73.53,92.46 0 bottom
TP64  SDCD  [PAD.03X.04]  72.26,84.2 270 bottom
TP65  CSIMUIO  [PAD.03X.04]  81.66,98.04 0 bottom
TP66  IMUINT  [PAD.03X.04]  71.75,100.84 0 bottom
TP67  IMUFS  [PAD.03X.04]  71.75,99.57 0 bottom
TP68  SWCLK  [PAD.03X.04]  69.09,11.3 0 bottom
TP69  BRK  [PAD.03X.04]  52.2,51.31 0 bottom
TP70  LTS  [PAD.03X.04]  55.37,51.31 0 bottom
TP71  RTS  [PAD.03X.04]  57.91,51.31 0 bottom
TP72  REV  [PAD.03X.04]  61.09,51.31 0 bottom
TP73  1V8  [PAD.03X.04]  75.31,94.62 0 bottom
TP74  VRPP  [PAD.03X.04]  21.72,90.55 270 bottom
TP75  VOVP  [PAD.03X.04]  19.94,90.55 270 bottom
TP76  VUSB  [PAD.03X.04]  15.88,101.22 270 bottom
TP77  5V  [PAD.03X.04]  17.65,101.22 270 bottom
TP78  SWDIO  [PAD.03X.04]  69.09,8.13 0 bottom
TP79  3V3  [PAD.03X.04]  19.43,101.22 270 bottom
TP80  GND  [PAD.03X.04]  21.21,101.22 270 bottom
TP81  AL1D  [PAD.03X.04]  90.04,105.66 0 bottom
TP82  AL1V  [PAD.03X.04]  92.58,105.66 0 bottom
TP83  AL1C  [PAD.03X.04]  95.12,105.66 0 bottom
TP84  AL2D  [PAD.03X.04]  81.66,105.66 0 bottom
TP85  AL2V  [PAD.03X.04]  84.2,105.66 0 bottom
TP86  AL2C  [PAD.03X.04]  86.74,105.66 0 bottom
TP87  AL3D  [PAD.03X.04]  73.28,105.66 0 bottom
TP88  AL3V  [PAD.03X.04]  75.82,105.66 0 bottom
TP89  AL3C  [PAD.03X.04]  78.36,105.66 0 bottom
TP90  AL4D  [PAD.03X.04]  64.9,105.66 0 bottom
TP91  AL4V  [PAD.03X.04]  67.44,105.66 0 bottom
TP92  AL4C  [PAD.03X.04]  69.98,105.66 0 bottom
TP93  BRK  [PAD.03X.04]  52.2,107.7 0 bottom
TP94  LTS  [PAD.03X.04]  55.37,107.7 0 bottom
TP95  RTS  [PAD.03X.04]  57.91,107.7 0 bottom
TP96  REV  [PAD.03X.04]  61.09,107.7 0 bottom
TP97  IIC1SDA  [PAD.03X.04]  37.21,105.66 0 bottom
TP98  IIC1SCL  [PAD.03X.04]  32.13,105.66 0 bottom
TP99  U7TX  [PAD.03X.04]  25.91,105.54 0 bottom
TP100  U7RX  [PAD.03X.04]  20.32,105.54 0 bottom
TP101  STMR  [PAD.03X.04]  30.99,99.57 0 bottom
TP102  SWCLK  [PAD.03X.04]  69.09,67.69 0 bottom
TP103  SWDIO  [PAD.03X.04]  69.09,64.52 0 bottom
TP104  EDRDY  [PAD.03X.04]  81.41,69.6 0 bottom
U1  ESP-WROOM-32  [ESP-WROOM-32]  88.77,22.48 0 top
U2  CP2102N-A01  [VQFN-28]  21.46,17.4 0 top
U3  [LQFP-100]  48.13,28.97 225 top
U4  1.8V  [DDC5]  75.06,36.04 90 top
U5  9DoF IMU  [QFN24-3X3]  80.14,41.12 90 top
U6  TXB0108DQSR  [UFDFN-20]  75.06,41.12 90 top
U7  3.3V  [SOT23-5]  18.03,42.93 270 top
U8  [LQFP-100]  48.13,85.36 225 top
U9  ESP-WROOM-32  [ESP-WROOM-32]  88.77,78.87 0 top
U10  9DoF IMU  [QFN24-3X3]  80.14,97.51 90 top
U11  1.8V  [DDC5]  75.06,92.43 90 top
U12  3.3V  [SOT23-5]  18.03,99.31 270 top
U13  TXB0108DQSR  [UFDFN-20]  75.06,97.51 90 top
U14  CP2102N-A01  [VQFN-28]  21.46,73.79 0 top
U$1  [ALED10]  96.9,52.83 0 bottom
U$2  [ALED21]  88.72,52.91 0 bottom
U$3  [ALED43]  71.98,52.88 0 bottom
U$4  [ALED33]  80.31,52.88 0 bottom
U$5  [INSIG4]  60.15,53.47 0 bottom
U$6  [UARTEXP7]  29.03,52.76 0 bottom
U$7  [I2CEXP6]  39.27,52.83 0 bottom
U$8  [EUSW5]  49.66,52.83 0 bottom
U$9  [SCLK1]  95.12,49.15 270 bottom
U$10  [SCLK1]  86.74,49.15 270 bottom
U$11  [SCLK1]  78.36,49.15 270 bottom
U$12  [SCLK1]  69.98,49.15 270 bottom
U$13  [VOUT2]  92.58,49.15 270 bottom
U$14  [VOUT2]  84.2,49.15 270 bottom
U$15  [VOUT2]  75.82,49.15 270 bottom
U$16  [VOUT2]  67.44,49.15 270 bottom
U$17  [DATA0]  90.04,49.15 270 bottom
U$18  [DATA0]  81.66,49.15 270 bottom
U$19  [DATA0]  73.28,49.15 270 bottom
U$20  [DATA0]  64.9,49.15 270 bottom
U$21  [RTS4]  57.91,50.8 270 bottom
U$22  [LTS3]  55.37,50.93 270 bottom
U$23  [BRK5]  52.2,50.8 270 bottom
U$24  [REV6]  61.09,50.8 270 bottom
U$25  [SCL8]  32.13,49.15 270 bottom
U$26  [SDA7]  37.21,49.15 270 bottom
U$27  [TX9]  25.91,49.02 270 bottom
U$28  [RX10]  20.32,49.02 270 bottom
U$29  [5VIN8]  20.7,41 270 bottom
U$30  [VUSB15]  15.88,44.88 270 bottom
U$31  [5V14]  17.63,43.99 270 bottom
U$32  [3V313]  19.43,44.35 270 bottom
U$33  [GND12]  21.21,44.42 270 bottom
U$34  [SWCLK16]  68.96,11.3 0 bottom
U$35  [SWDIO15]  68.96,8.13 0 bottom
U$36  [SCLK20]  86.23,12.95 270 bottom
U$37  [CS21]  83.69,12.57 270 bottom
U$38  [MISO18]  88.65,12.95 270 bottom
U$39  [MOSI17]  91.31,12.95 270 bottom
U$40  [DRDY19]  81.41,13.08 270 bottom
U$41  [ESPSPI9]  90.81,14.99 0 bottom
U$42  [ANTENNA10]  101.22,29.34 270 bottom
U$43  [SD_CARD11]  101.22,45.08 270 bottom
U$44  [USB_ESP12]  17.78,22.35 270 bottom
U$45  [USB_STM13]  17.53,34.67 270 bottom
U$46  [MOSI17]  71.25,40.64 0 bottom
U$47  [MISO18]  71.25,41.91 0 bottom
U$48  [SCLK20]  71.25,39.37 0 bottom
U$49  [CS21]  70.74,38.1 0 bottom
U$50  [FSYNC23]  71.5,43.18 0 bottom
U$51  [INT22]  70.99,44.45 0 bottom
U$52  [STM_#RST26]  30.99,43.05 270 bottom
U$53  [SD_#CS24]  72.14,25.27 0 bottom
U$54  [SD_CD27]  72.14,27.81 0 bottom
U$55  [DOPPLER_LED_CONTROLLER0]  57.78,11.81 24 bottom
U$56  [ULED23]  49.4,11.43 90 top
U$57  [ULED12]  46.86,11.43 90 top
U$58  [US10]  46.86,8.13 90 top
U$59  [US21]  49.4,8 90 top
U$60  [ESP_#RST5]  86.49,7.11 90 top
U$61  [ESP_#06]  88.77,7.75 90 top
U$62  [PGM_#_DBG7]  77.34,8.13 90 top
U$63  [TX9]  29.08,49.66 90 top
U$64  [RX10]  17.14,49.66 90 top
U$65  [PWR8]  12.06,44.58 90 top
U$66  [TX9]  24.26,24.77 90 top
U$67  [RX10]  25.53,24.77 90 top
U$68  [DOPPLER_LED_CONTROLLER0]  33.27,14.22 90 top
U$69  [STM_#RST24]  25.15,38.61 90 top
U$70  [USB_STM13]  22.35,23.62 90 top
U$71  [USB_ESP12]  25.91,12.06 90 top
U$72  [3V310]  45.97,42.42 90 top
U$73  [BOOT09]  50.29,41.66 90 top
U$74  [ALED10]  88.14,47.5 0 top
U$75  [ALED21]  79.63,47.5 0 top
U$76  [ALED33]  71.25,47.5 0 top
U$77  [ALED42]  62.87,47.5 0 top
U$78  [INSIG4]  52.58,47.5 0 top
U$79  [UARTEXP7]  17.4,47.5 0 top
U$80  [I2CEXP6]  30.1,47.5 0 top
U$81  [EUSW5]  41.66,47.5 0 top
U$82  [3V310]  38.35,49.28 90 top
U$83  [3V310]  70.99,49.28 90 top
U$84  [3V310]  79.38,49.28 90 top
U$85  [3V310]  87.76,49.28 90 top
U$86  [3V310]  96.14,49.28 90 top
U$87  [5V11]  30.99,49.66 90 top
U$88  [5V11]  63.75,49.78 90 top
U$89  [5V11]  72.26,49.66 90 top
U$90  [5V11]  80.65,49.66 90 top
U$91  [5V11]  89.03,49.66 90 top
U$92  [SPI116]  73.53,44.32 270 bottom
U$93  [3V39]  76.76,33.71 0 bottom
U$94  [1V817]  76.71,38.48 0 bottom
U$95  [1V8_FOR_ICM_2094818]  73.53,36.7 0 bottom
U$96  [3V3_FOR_MPU_925019]  73.53,35.56 0 bottom
U$97  [MPU20]  79.25,37.85 270 bottom
U$98  [ALED10]  96.9,109.22 0 bottom
U$99  [ALED21]  88.72,109.3 0 bottom
U$100  [ALED43]  71.98,109.27 0 bottom
U$101  [ALED33]  80.31,109.27 0 bottom
U$102  [INSIG4]  60.15,109.86 0 bottom
U$103  [UARTEXP7]  29.03,109.14 0 bottom
U$104  [I2CEXP6]  39.27,109.22 0 bottom
U$105  [EUSW5]  49.66,109.22 0 bottom
U$106  [SCLK1]  95.12,105.54 270 bottom
U$107  [SCLK1]  86.74,105.54 270 bottom
U$108  [SCLK1]  78.36,105.54 270 bottom
U$109  [SCLK1]  69.98,105.54 270 bottom
U$110  [VOUT2]  92.58,105.54 270 bottom
U$111  [VOUT2]  84.2,105.54 270 bottom
U$112  [VOUT2]  75.82,105.54 270 bottom
U$113  [VOUT2]  67.44,105.54 270 bottom
U$114  [DATA0]  90.04,105.54 270 bottom
U$115  [DATA0]  81.66,105.54 270 bottom
U$116  [DATA0]  73.28,105.54 270 bottom
U$117  [DATA0]  64.9,105.54 270 bottom
U$118  [RTS4]  57.91,107.19 270 bottom
U$119  [LTS3]  55.37,107.31 270 bottom
U$120  [BRK5]  52.2,107.19 270 bottom
U$121  [REV6]  61.09,107.19 270 bottom
U$122  [SCL8]  32.13,105.54 270 bottom
U$123  [SDA7]  37.21,105.54 270 bottom
U$124  [TX9]  25.91,105.41 270 bottom
U$125  [RX10]  20.32,105.41 270 bottom
U$126  [5VIN8]  20.7,97.38 270 bottom
U$127  [SWCLK16]  68.96,67.69 0 bottom
U$128  [SWDIO15]  68.96,64.52 0 bottom
U$129  [SCLK20]  86.23,69.34 270 bottom
U$130  [CS21]  83.69,68.96 270 bottom
U$131  [MISO18]  88.65,69.34 270 bottom
U$132  [MOSI17]  91.31,69.34 270 bottom
U$133  [DRDY19]  81.41,69.47 270 bottom
U$134  [ESPSPI9]  90.81,71.37 0 bottom
U$135  [ANTENNA10]  101.22,85.73 270 bottom
U$136  [SD_CARD11]  101.22,101.47 270 bottom
U$137  [USB_ESP12]  17.78,78.74 270 bottom
U$138  [USB_STM13]  17.53,91.06 270 bottom
U$139  [MOSI17]  71.25,97.03 0 bottom
U$140  [MISO18]  71.25,98.3 0 bottom
U$141  [SCLK20]  71.25,95.76 0 bottom
U$142  [CS21]  70.74,94.49 0 bottom
U$143  [FSYNC23]  71.5,99.57 0 bottom
U$144  [INT22]  70.99,100.84 0 bottom
U$145  [STM_#RST26]  30.99,99.44 270 bottom
U$146  [SD_#CS24]  72.14,81.66 0 bottom
U$147  [SD_CD27]  72.14,84.2 0 bottom
U$148  [DOPPLER_LED_CONTROLLER0]  57.78,68.2 24 bottom
U$149  [ULED23]  49.4,67.82 90 top
U$150  [ULED12]  46.86,67.82 90 top
U$151  [US10]  46.86,64.52 90 top
U$152  [US21]  49.4,64.39 90 top
U$153  [ESP_#RST5]  86.49,63.5 90 top
U$154  [ESP_#06]  88.77,64.14 90 top
U$155  [PGM_#_DBG7]  77.34,64.52 90 top
U$156  [TX9]  29.08,106.05 90 top
U$157  [RX10]  17.14,106.05 90 top
U$158  [PWR8]  12.06,100.97 90 top
U$159  [TX9]  24.26,81.15 90 top
U$160  [RX10]  25.53,81.15 90 top
U$161  [DOPPLER_LED_CONTROLLER0]  33.27,70.61 90 top
U$162  [STM_#RST24]  25.15,95 90 top
U$163  [USB_STM13]  22.35,80.01 90 top
U$164  [USB_ESP12]  25.91,68.45 90 top
U$165  [3V310]  45.97,98.81 90 top
U$166  [BOOT09]  50.29,98.04 90 top
U$167  [ALED10]  88.14,103.89 0 top
U$168  [ALED21]  79.63,103.89 0 top
U$169  [ALED33]  71.25,103.89 0 top
U$170  [ALED42]  62.87,103.89 0 top
U$171  [INSIG4]  52.58,103.89 0 top
U$172  [UARTEXP7]  17.4,103.89 0 top
U$173  [I2CEXP6]  30.1,103.89 0 top
U$174  [EUSW5]  41.66,103.89 0 top
U$175  [3V310]  38.35,105.66 90 top
U$176  [3V310]  70.99,105.66 90 top
U$177  [3V310]  79.38,105.66 90 top
U$178  [3V310]  87.76,105.66 90 top
U$179  [3V310]  96.14,105.66 90 top
U$180  [5V11]  30.99,106.05 90 top
U$181  [5V11]  63.75,106.17 90 top
U$182  [5V11]  72.26,106.05 90 top
U$183  [5V11]  80.65,106.05 90 top
U$184  [5V11]  89.03,106.05 90 top
U$185  [VUSB15]  15.88,101.27 270 bottom
U$186  [5V14]  17.63,100.38 270 bottom
U$187  [3V313]  19.43,100.74 270 bottom
U$188  [GND12]  21.21,100.81 270 bottom
U$189  [SPI116]  73.53,100.71 270 bottom
U$190  [3V39]  76.76,90.09 0 bottom
U$191  [1V817]  76.71,94.87 0 bottom
U$192  [1V8_FOR_ICM_2094818]  73.53,93.09 0 bottom
U$193  [3V3_FOR_MPU_925019]  73.53,91.95 0 bottom
U$194  [MPU20]  79.25,94.23 270 bottom
Y1  24MHz  [CRYSTAL-SMD-5X3.2-4PAD]  39.52,37.98 45 top
Y2  24MHz  [CRYSTAL-SMD-5X3.2-4PAD]  39.52,94.37 45 top

## Library data of the parts
C1 C3 C4 C6 C12-C16 C23-C28 C30 C32 C35 = SparkFun-Capacitors; PROD_ID: CAP-08604
C2 C10 C11 C17 C18 C21 C22 C33 C34 C36 = SparkFun-Capacitors; PROD_ID: CAP-07888
C5 C9 C29 C31 = SparkFun-Capacitors; PROD_ID: CAP-11015
C7 C8 C19 C20 = SparkFun-Capacitors; PROD_ID: CAP-08267
D1 D6 D14 D19 = SparkFun-LED; PROD_ID: DIO-00821
D2 D18 M1-M38 Q2-Q10 Q12-Q21 Q24-Q32 Q35-Q38 U2 U3 U8 U14 Y1 Y2 = MTAES_V2_UniqueParts
D3 D8 D15 D20 = SparkFun-LED; PROD_ID: DIO-09003
D4 D7 = SparkFun-LED; PROD_ID: DIO-08575
D5 D9 = SparkFun-LED; PROD_ID: DIO-09004
D10 D16 = SparkFun-DiscreteSemi; PROD_ID: DIO-12442
D11 D17 = SparkFun-DiscreteSemi; PROD_ID: DIO-14072
D12 D13 = SparkFun-LED; PROD_ID: DIO-00819
E$1-E$4 FD1-FD8 = SparkFun-Aesthetics
E$5 E$6 = SparkFun-Retired
F1 F2 = SparkFun-Fuses
H1-H8 = SparkFun-Hardware
J1 J2 J4 J6 = SparkFun-Connectors; PROD_ID: CONN-13711
J3 J5 TP1-TP104 = SparkFun-Connectors
JP1-JP20 = SparkFun-Jumpers
Q1 Q11 = SparkFun-DiscreteSemi; PROD_ID: TRANS-13337
Q22 Q23 Q33 Q34 = SparkFun-DiscreteSemi; PROD_ID: TRANS-11153
R1 R10 R112 R117 = SparkFun-Resistors; PROD_ID: RES-07868
R2 R7 R8 R11 R12 R53 R55 R69 R94-R98 R113-R115 = SparkFun-Resistors; PROD_ID: RES-07856
R3-R6 R9 R15-R36 R38-R40 R42-R44 R46-R48 R50-R52 R54 R56-R68 R70-R78 R83-R86 R89-R93 R99-R111 R116 R118 = SparkFun-Resistors; PROD_ID: RES-00824
R13 R14 R87 R88 = SparkFun-Resistors; PROD_ID: RES-07862
R37 R41 R45 R49 R79-R82 = SparkFun-Resistors; PROD_ID: RES-08272
S1-S10 = SparkFun-Switches; PROD_ID: SWCH-08247; SF_SKU: COM-08720
U1 U9 = SparkFun-RF; PROD_ID: IC-13849
U4 U11 = MTAES_V2_UniqueParts; MANUFACTURER_PART_NUMBER: TPS78218DDCR; VENDOR: Texas Instruments
U5 U10 = MTAES_V2_UniqueParts; PROD_ID: IC-13192
U6 U13 = SparkFun-IC-Comms; PROD_ID: IC-12292
U7 U12 = SparkFun-IC-Power; PROD_ID: VREG-12457
U$1-U$8 U$29 U$41-U$45 U$70 U$71 U$74-U$81 U$98-U$105 U$126 U$134-U$138 U$163 U$164 U$167-U$174 = buzzard_labels_ALED
U$9-U$28 U$34-U$40 U$46-U$54 U$63 U$64 U$66 U$67 U$69 U$106-U$125 U$127-U$133 U$139-U$147 U$156 U$157 U$159 U$160 U$162 = buzzard_labels_TESTPOINTS
U$30-U$33 U$56-U$62 U$65 U$72 U$73 U$82-U$97 U$149-U$155 U$158 U$165 U$166 U$175-U$194 = buzzard_labels_BUTTONS
U$55 U$68 U$148 U$161 = buzzard_labels_TITLE

## Nets
1.8V: JP9.3 TP18.P$1 U4.5
1.8V1: JP8.3 TP73.P$1 U11.5
3.3V: C2.1 C3.1 C4.1 C5.1 C6.1 C9.1 C14.1 C16.1 C18.1 D1.A D2.4VCC D3.A D4.A D5.A D6.A D8.A D12.A J3.1 JP1.1 JP2.1 JP3.1 JP4.1 JP5.3 JP6.1 JP7.3 JP9.1 M1.P$2 M2.P$2 M21.CD_SW2 M21.P$4 Q2.1 Q3.1 Q4.1 Q5.1 Q6.1 Q7.1 Q8.1 Q9.1 Q10.1 Q12.1 Q14.1 Q16.1 Q18.1 Q19.1 Q20.1 Q21.1 R2.1 R6.2 R9.2 R17.2 R18.2 R19.2 R21.2 R22.2 R23.2 R24.2 R29.2 R30.2 R31.2 R32.2 R37.2 R39.2 R45.2 R47.2 R57.2 R58.2 R59.2 R60.2 R65.2 R67.2 S3.3 S3.4 S5.3 S5.4 TP51.P$1 U1.2 U2.6 U2.7 U3.P$11 U3.P$27 U3.P$50 U3.P$75 U3.P$100 U4.1 U4.3 U5.13 U6.16 U7.5
3.3V1: C24.1 C25.1 C26.1 C29.1 C30.1 C31.1 C34.1 C35.1 C36.1 D7.A D9.A D13.A D14.A D15.A D18.4VCC D19.A D20.A J5.1 JP8.1 JP13.1 JP14.1 JP15.1 JP16.1 JP17.3 JP18.3 JP20.1 M12.CD_SW2 M12.P$4 M37.P$2 M38.P$2 Q13.1 Q15.1 Q17.1 Q24.1 Q25.1 Q26.1 Q27.1 Q28.1 Q29.1 Q30.1 Q31.1 Q32.1 Q35.1 Q36.1 Q37.1 Q38.1 R44.2 R48.2 R52.2 R56.2 R71.2 R73.2 R75.2 R77.2 R80.2 R81.2 R84.2 R85.2 R89.2 R90.2 R91.2 R100.2 R101.2 R102.2 R104.2 R106.2 R108.2 R110.2 R111.2 R115.1 S7.3 S7.4 S8.3 S8.4 TP79.P$1 U8.P$11 U8.P$27 U8.P$50 U8.P$75 U8.P$100 U9.2 U10.13 U11.1 U11.3 U12.5 U13.16 U14.6 U14.7
5V: C17.1 D11.C JP1.3 JP2.3 JP3.3 JP4.3 JP5.1 JP7.1 Q23.2 TP50.P$1 U7.1 U7.3
5V1: C33.1 D17.C JP13.3 JP14.3 JP15.3 JP16.3 JP17.1 JP18.1 Q34.2 TP77.P$1 U12.1 U12.3
ALED1_MOSI_VOUT: M3.P$1 M7.P$1 Q6.3 R33.1
ALED1_MOSI_VOUT1: M14.P$1 M31.P$1 Q15.3 R50.1
ALED1_SCLK_VOUT: M3.P$3 M7.P$3 Q2.3 R25.1
ALED1_SCLK_VOUT1: M14.P$3 M31.P$3 Q13.3 R46.1
ALED1_VOUT: JP1.2 R25.2 R33.2 TP38.P$1
ALED1_VOUT1: JP13.2 R46.2 R50.2 TP82.P$1
ALED2_MOSI_VOUT: M4.P$1 M8.P$1 Q7.3 R34.1
ALED2_MOSI_VOUT1: M16.P$1 M32.P$1 Q24.3 R70.1
ALED2_SCLK_VOUT: M4.P$3 M8.P$3 Q3.3 R26.1
ALED2_SCLK_VOUT1: M16.P$3 M32.P$3 Q17.3 R54.1
ALED2_VOUT: JP2.2 R26.2 R34.2 TP39.P$1
ALED2_VOUT1: JP14.2 R54.2 R70.2 TP85.P$1
ALED3_MOSI_VOUT: M5.P$1 M9.P$1 Q8.3 R35.1
ALED3_MOSI_VOUT1: M18.P$1 M33.P$1 Q26.3 R74.1
ALED3_SCLK_VOUT: M5.P$3 M9.P$3 Q4.3 R27.1
ALED3_SCLK_VOUT1: M18.P$3 M33.P$3 Q25.3 R72.1
ALED3_VOUT: JP3.2 R27.2 R35.2 TP40.P$1
ALED3_VOUT1: JP15.2 R72.2 R74.2 TP88.P$1
ALED4_MOSI_VOUT: M6.P$1 M10.P$1 Q9.3 R36.1
ALED4_MOSI_VOUT1: M24.P$1 M34.P$1 Q28.3 R78.1
ALED4_SCLK_VOUT: M6.P$3 M10.P$3 Q5.3 R28.1
ALED4_SCLK_VOUT1: M24.P$3 M34.P$3 Q27.3 R76.1
ALED4_VOUT: JP4.2 R28.2 R36.2 TP41.P$1
ALED4_VOUT1: JP16.2 R76.2 R78.2 TP91.P$1
BOOT0: JP6.2 R38.2 U3.P$94
BOOT1: JP20.2 R118.2 U8.P$94
BRK: Q18.2 R57.1 TP69.P$1 U3.P$81
BRK1: Q35.2 R102.1 TP93.P$1 U8.P$81
BRK_12V: M19.P$1 M20.P$1 Q18.3 R61.1
BRK_12V1: M35.P$1 M36.P$1 Q35.3 R103.1
CS_ESP: TP10.P$1 U1.29 U3.P$4
CS_ESP1: TP28.P$1 U8.P$4 U9.29
CS_IMU: R67.1 TP24.P$1 U3.P$3 U6.20
CS_IMU1: R100.1 TP61.P$1 U8.P$3 U13.20
CS_IMU_VDDIO: TP29.P$1 U5.22 U6.1
CS_IMU_VDDIO1: TP65.P$1 U10.22 U13.1
CS_SD: M21.P$2 R65.1 TP23.P$1 U3.P$2
CS_SD1: M12.P$2 R101.1 TP60.P$1 U8.P$2
ESP_0: Q1.1 R6.1 S1.1 S1.2 U1.25
ESP_1: Q11.1 R110.1 S9.1 S9.2 U9.25
ESP_!DTR: Q1.6 R3.2 TP6.P$1 U2.28
ESP_!DTR1: Q11.6 R15.2 TP16.P$1 U14.28
ESP_!RESET: C1.1 Q1.3 R9.1 S2.1 S2.2 TP13.P$1 U1.3
ESP_!RESET1: C23.1 Q11.3 R111.1 S10.1 S10.2 TP46.P$1 U9.3
ESP_!RTS: Q1.4 R4.2 TP5.P$1 U2.24
ESP_!RTS1: Q11.4 R40.2 TP15.P$1 U14.24
ESP_DRDY: TP1.P$1 U1.24 U3.P$9
ESP_DRDY1: TP104.P$1 U8.P$9 U9.24
ESP_RXI0: R8.1 TP3.P$1 U1.34 U2.26
ESP_RXI1: R114.1 TP2.P$1 U9.34 U14.26
ESP_STAT_MOSI: D2.1DIN TP11.P$1 U1.16
ESP_STAT_MOSI1: D18.1DIN TP32.P$1 U9.16
ESP_STAT_SCLK: D2.2CIN TP12.P$1 U1.13
ESP_STAT_SCLK1: D18.2CIN TP33.P$1 U9.13
ESP_TXO0: R7.1 TP4.P$1 U1.35 U2.25
ESP_TXO1: R113.1 TP14.P$1 U9.35 U14.25
ESP_USB_DM: J1.D- U2.5
ESP_USB_DM1: J6.D- U14.5
ESP_USB_DP: J1.D+ U2.4
ESP_USB_DP1: J6.D+ U14.4
GND: C1.2 C2.2 C3.2 C4.2 C5.2 C6.2 C7.1 C8.1 C9.2 C10.2 C11.2 C12.1 C13.2 C14.2 C15.2 C16.2 C17.2 C18.2 D2.3GND D10.A J1.GND J2.GND J3.3 J3.5 J3.9 M3.P$2 M4.P$2 M5.P$2 M6.P$2 M7.P$2 M8.P$2 M9.P$2 M10.P$2 M11.P$4 M13.P$4 M15.P$4 M17.P$4 M21.P$6 M22.P$1 M23.P$2 Q22.1 R1.1 R5.1 R10.1 R16.1 R20.1 R38.1 R61.2 R62.2 R63.2 R64.2 R66.1 R68.1 R69.1 S1.3 S1.4 S2.3 S2.4 S4.3 S4.4 TP52.P$1 U1.1 U1.15 U1.38 U1.GND U2.3 U2.PAD U3.P$10 U3.P$26 U3.P$49 U3.P$74 U3.P$99 U4.2 U4.4 U5.18 U5.20 U6.15 U7.2 Y1.2 Y1.4
GND1: C19.1 C20.1 C21.2 C22.2 C23.2 C24.2 C25.2 C26.2 C27.2 C28.2 C29.2 C30.2 C31.2 C32.1 C33.2 C34.2 C35.2 C36.2 D16.A D18.3GND J4.GND J5.3 J5.5 J5.9 J6.GND M12.P$6 M14.P$2 M16.P$2 M18.P$2 M24.P$2 M25.P$4 M26.P$4 M27.P$2 M28.P$1 M29.P$4 M30.P$4 M31.P$2 M32.P$2 M33.P$2 M34.P$2 Q33.1 R42.1 R92.1 R93.1 R98.1 R99.1 R103.2 R105.2 R107.2 R109.2 R112.1 R116.1 R117.1 R118.1 S6.3 S6.4 S9.3 S9.4 S10.3 S10.4 TP80.P$1 U8.P$10 U8.P$26 U8.P$49 U8.P$74 U8.P$99 U9.1 U9.15 U9.38 U9.GND U10.18 U10.20 U11.2 U11.4 U12.2 U13.15 U14.3 U14.PAD Y2.2 Y2.4
I2C1_SCL: Q10.2 R37.1 TP54.P$1 U3.P$95
I2C1_SCL1: Q29.2 R80.1 TP98.P$1 U8.P$95
I2C1_SCL_VOUT: M11.P$1 M15.P$1 Q10.3 R41.1
I2C1_SCL_VOUT1: M25.P$1 M29.P$1 Q29.3 R79.1
I2C1_SDA: Q14.2 R45.1 TP53.P$1 U3.P$93
I2C1_SDA1: Q30.2 R81.1 TP97.P$1 U8.P$93
I2C1_SDA_VOUT: M11.P$2 M15.P$2 Q14.3 R49.1
I2C1_SDA_VOUT1: M25.P$2 M29.P$2 Q30.3 R82.1
I2C1_VOUT: JP5.2 M11.P$3 M15.P$3 R41.2 R49.2
I2C1_VOUT1: JP17.2 M25.P$3 M29.P$3 R79.2 R82.2
I2C2_SCL: U3.P$46
I2C2_SCL1: U8.P$46
I2C2_SDA: U3.P$47
I2C2_SDA1: U8.P$47
IMU_FSYNC: TP31.P$1 U3.P$64 U6.12
IMU_FSYNC1: TP67.P$1 U8.P$64 U13.12
IMU_FSYNC_VDDIO: U5.11 U6.9
IMU_FSYNC_VDDIO1: U10.11 U13.9
IMU_INT: TP30.P$1 U3.P$63 U6.11
IMU_INT1: TP66.P$1 U8.P$63 U13.11
IMU_INT_VDDIO: U5.12 U6.10
IMU_INT_VDDIO1: U10.12 U13.10
IMU_RESV1: JP10.1 U5.1
IMU_RESV2: JP12.1 U10.1
IMU_VDDIO: C13.1 JP9.2 JP10.2 TP17.P$1 U5.8 U6.5 U6.6
IMU_VDDIO1: C28.1 JP8.2 JP12.2 TP63.P$1 U10.8 U13.5 U13.6
LTS: Q19.2 R58.1 TP70.P$1 U3.P$82
LTS1: Q36.2 R104.1 TP94.P$1 U8.P$82
LTS_12V: M19.P$2 M20.P$2 Q19.3 R62.1
LTS_12V1: M35.P$2 M36.P$2 Q36.3 R105.1
N$1: C22.1 U8.P$73
N$2: J2.SHIELD J2.SHIELD2 J2.SHIELD3 J2.SHIELD4 J2.SHIELD5 J2.SHIELD6 J2.SHIELD7 J2.SHIELD8 J2.SHIELD9 J2.SHIELD10 R10.2
N$3: C11.1 U3.P$73
N$4: J1.SHIELD J1.SHIELD2 J1.SHIELD3 J1.SHIELD4 J1.SHIELD5 J1.SHIELD6 J1.SHIELD7 J1.SHIELD8 J1.SHIELD9 J1.SHIELD10 R1.2
N$5: C10.1 U3.P$48
N$6: C21.1 U8.P$48
N$7: Q1.5 R3.1
N$8: Q1.2 R4.1
N$9: R5.2 U2.11
N$10: R2.2 U2.9
N$11: Q11.5 R15.1
N$12: Q11.2 R40.1
N$13: C15.1 U5.10
N$14: C27.1 U10.10
N$15: D8.C R55.2
N$16: J3.2 R13.1
N$17: J3.4 R14.1
N$18: J5.2 R88.1
N$19: D6.C R53.2
N$20: D1.C R7.2
N$21: D3.C R8.2
N$22: D12.C R69.2
N$23: J5.4 R87.1
N$24: D15.C R97.2
N$25: D5.C R12.2
N$26: D4.C R11.2
N$27: D14.C R96.2
N$28: D13.C R98.2
N$29: D9.C R95.2
N$30: D7.C R94.2
N$31: J6.SHIELD J6.SHIELD2 J6.SHIELD3 J6.SHIELD4 J6.SHIELD5 J6.SHIELD6 J6.SHIELD7 J6.SHIELD8 J6.SHIELD9 J6.SHIELD10 R112.2
N$32: D19.C R113.2
N$33: D20.C R114.2
N$34: R115.2 U14.9
N$35: R116.2 U14.11
N$36: J4.SHIELD J4.SHIELD2 J4.SHIELD3 J4.SHIELD4 J4.SHIELD5 J4.SHIELD6 J4.SHIELD7 J4.SHIELD8 J4.SHIELD9 J4.SHIELD10 R117.2
PH0: C7.2 U3.P$12 Y1.3
PH1: C8.2 U3.P$13 Y1.1
PH2: C20.2 U8.P$13 Y2.1
PH3: C19.2 U8.P$12 Y2.3
QSPI_BK1_IO0: Q9.2 R32.1 TP37.P$1 U3.P$58
QSPI_BK1_IO1: U3.P$59
QSPI_BK1_IO2: U8.P$59
QSPI_BK1_IO3: Q28.2 R77.1 TP90.P$1 U8.P$58
QSPI_BK1_NCS: U3.P$92
QSPI_BK1_NCS1: U8.P$92
QSPI_SCLK: Q5.2 R24.1 TP45.P$1 U3.P$36
QSPI_SCLK1: Q27.2 R75.1 TP92.P$1 U8.P$36
REV: Q21.2 R60.1 TP72.P$1 U3.P$84
REV1: Q38.2 R108.1 TP96.P$1 U8.P$84
REV_12V: M19.P$4 M20.P$4 Q21.3 R64.1
REV_12V1: M35.P$4 M36.P$4 Q38.3 R109.1
RTS: Q20.2 R59.1 TP71.P$1 U3.P$83
RTS1: Q37.2 R106.1 TP95.P$1 U8.P$83
RTS_12V: M19.P$3 M20.P$3 Q20.3 R63.1
RTS_12V1: M35.P$3 M36.P$3 Q37.3 R107.1
SD_CD: M21.CD_SW1 R66.2 TP25.P$1 U3.P$15
SD_CD1: M12.CD_SW1 R42.2 TP64.P$1 U8.P$15
SPI1_MISO: M21.P$7 TP21.P$1 U3.P$30 U6.13
SPI1_MISO1: M12.P$7 TP56.P$1 U8.P$30 U13.13
SPI1_MISO_VDDIO: U5.9 U6.8
SPI1_MISO_VDDIO1: U10.9 U13.8
SPI1_MOSI: M21.P$3 TP20.P$1 U3.P$88 U6.18
SPI1_MOSI1: M12.P$3 TP55.P$1 U8.P$88 U13.18
SPI1_MOSI_VDDIO: U5.24 U6.3
SPI1_MOSI_VDDIO1: U10.24 U13.3
SPI1_SCLK: M21.P$5 TP22.P$1 U3.P$89 U6.19
SPI1_SCLK1: M12.P$5 TP59.P$1 U8.P$89 U13.19
SPI1_SCLK_VDDIO: U5.23 U6.2
SPI1_SCLK_VDDIO1: U10.23 U13.2
SPI2_MOSI: Q6.2 R29.1 TP34.P$1 U3.P$16
SPI2_MOSI1: Q15.2 R48.1 TP81.P$1 U8.P$16
SPI2_SCLK: Q2.2 R21.1 TP42.P$1 U3.P$52
SPI2_SCLK1: Q13.2 R44.1 TP83.P$1 U8.P$52
SPI3_MOSI: Q7.2 R30.1 TP35.P$1 U3.P$87
SPI3_MOSI1: Q24.2 R56.1 TP84.P$1 U8.P$87
SPI3_SCLK: Q3.2 R22.1 TP43.P$1 U3.P$78
SPI3_SCLK1: Q17.2 R52.1 TP86.P$1 U8.P$78
SPI4_MOSI: Q8.2 R31.1 TP36.P$1 U3.P$5
SPI4_MOSI1: Q26.2 R73.1 TP87.P$1 U8.P$5
SPI4_SCLK: Q4.2 R23.1 TP44.P$1 U3.P$1
SPI4_SCLK1: Q25.2 R71.1 TP89.P$1 U8.P$1
SPI6_MISO: TP8.P$1 U1.31 U3.P$90
SPI6_MISO1: TP26.P$1 U8.P$90 U9.31
SPI6_MOSI: TP7.P$1 U1.37 U3.P$31
SPI6_MOSI1: TP19.P$1 U8.P$31 U9.37
SPI6_SCLK: TP9.P$1 U1.30 U3.P$29
SPI6_SCLK1: TP27.P$1 U8.P$29 U9.30
STM_!RESET: C12.2 J3.10 R19.1 S4.1 S4.2 TP62.P$1 U3.P$14
STM_!RESET1: C32.2 J5.10 R91.1 S6.1 S6.2 TP101.P$1 U8.P$14
STM_USB_DM: J2.D- U3.P$70
STM_USB_DM1: J4.D- U8.P$70
STM_USB_DP: J2.D+ U3.P$71
STM_USB_DP1: J4.D+ U8.P$71
SWCLK: R14.2 R17.1 TP68.P$1 U3.P$76
SWCLK1: R87.2 R89.1 TP102.P$1 U8.P$76
SWDIO: R13.2 R18.1 TP78.P$1 U3.P$72
SWDIO1: R88.2 R90.1 TP103.P$1 U8.P$72
UART4_RX: U1.28 U3.P$23
UART4_RX1: U8.P$23 U9.28
UART4_TX: U1.27 U3.P$22
UART4_TX1: U8.P$22 U9.27
UART5_RX: U3.P$51
UART5_RX1: U8.P$51
UART5_TX: U3.P$80
UART5_TX1: U8.P$80
UART7_RX: Q16.2 R47.1 R55.1 TP58.P$1 U3.P$37
UART7_RX1: Q32.2 R85.1 R97.1 TP100.P$1 U8.P$37
UART7_RX_VOUT: M13.P$1 M17.P$1 Q16.3 R51.1
UART7_RX_VOUT1: M26.P$1 M30.P$1 Q32.3 R86.1
UART7_TX: Q12.2 R39.1 R53.1 TP57.P$1 U3.P$38
UART7_TX1: Q31.2 R84.1 R96.1 TP99.P$1 U8.P$38
UART7_TX_VOUT: M13.P$2 M17.P$2 Q12.3 R43.1
UART7_TX_VOUT1: M26.P$2 M30.P$2 Q31.3 R83.1
UART7_VOUT: JP7.2 M13.P$3 M17.P$3 R43.2 R51.2
UART7_VOUT1: JP18.2 M26.P$3 M30.P$3 R83.2 R86.2
UART8_RX: U3.P$97
UART8_RX1: U8.P$97
UART8_TX: U3.P$98
UART8_TX1: U8.P$98
ULED1: R11.1 U3.P$7
ULED2: R12.1 U3.P$8
ULED3: R95.1 U8.P$8
ULED4: R94.1 U8.P$7
US1: M1.P$3 M2.P$3 R20.2 S5.1 S5.2 U3.P$85
US2: M1.P$1 M2.P$1 R16.2 S3.1 S3.2 U3.P$86
US3: M37.P$1 M38.P$1 R92.2 S7.1 S7.2 U8.P$86
US4: M37.P$3 M38.P$3 R93.2 S8.1 S8.2 U8.P$85
USB_OTG_FS_ID: J2.ID U3.P$69
USB_OTG_FS_ID1: J4.ID U8.P$69
USB_OTG_FS_SOF: U3.P$67
USB_OTG_FS_SOF1: U8.P$67
V_USB: D11.A J1.VBUS J2.VBUS Q23.1 R68.2 TP49.P$1 U2.8 U3.P$68
V_USB1: D17.A J4.VBUS J6.VBUS Q34.1 R99.2 TP76.P$1 U8.P$68 U14.8
VOVP: D10.C F1.2 JP11.2 Q23.3 TP48.P$1
VOVP1: D16.C F2.2 JP19.2 Q34.3 TP75.P$1
VRAW: M22.P$2 M23.P$3 Q22.3
VRAW1: M27.P$3 M28.P$2 Q33.3
VRPP: F1.1 JP11.1 Q22.2 TP47.P$1
VRPP1: F2.1 JP19.1 Q33.2 TP74.P$1

## Tracks (layer width: path | path; a pad name or v marks a point on that pad's centre or on a via)
1.8V  (via drill 0.38)
  Top 0.508: U4.5 73.79,37.13 73.35,37.13 v73.28,37.06
  Bottom 0.508: v73.28,37.06 JP9.3 75.31,37.06 TP18.P$1
1.8V1  (via drill 0.38)
  Top 0.508: U11.5 73.79,93.52 73.35,93.52 v73.28,93.45
  Bottom 0.508: v73.28,93.45 JP8.3 75.31,93.45 TP73.P$1
3.3V  (via drill 0.38)
  Top 0.203: U5.13 81.14,43.14 81.44,43.45 v81.44,43.66 | U3.P$100 50.16,39.49 50.16,40.39 49.84,40.72 C6.1 48.31,40.72 48.13,40.89 48.13,43.05 47.73,43.46 JP6.1 46.74,44.2 44.32,41.78 44.32,39.75 42.29,37.72 42.29,36.23 U3.P$11 | U6.16 74.83,40.92 75.06,41.15 v75.06,43.43 | U3.P$27 39.37,27.98 39.37,28.68 38.23,29.82 C9.1 | U3.P$50 46.35,18.7 v46.35,13.34 | D2.4VCC 72.2,31.31 72.14,31.37 | U3.P$75 58.54,27.05 v58.93,27.05 | 17.91,15.88 17.91,16.26 18.05,16.4 U2.6 | 17.91,15.88 v17.91,14.73 | 17.91,15.88 17.93,15.9 U2.7
  Top 0.508: Q5.1 68.27,53.69 R24.2 68.45,53.51 JP4.1 v68.45,49.78 | Q9.1 64.71,53.69 R32.2 63.75,52.54 v63.75,51.69 | Q8.1 73.09,53.69 R31.2 72.26,52.67 v72.26,51.82 | Q4.1 76.65,53.69 R23.2 76.84,53.51 JP3.1 v76.84,49.78 | Q3.1 85.03,53.69 R22.2 85.22,53.51 JP2.1 v85.22,49.78 | Q7.1 81.47,53.69 R30.2 80.65,52.67 v80.65,51.94 | Q6.1 89.85,53.69 R29.2 89.05,52.69 v89.05,51.94 | v93.6,49.78 JP1.1 93.6,53.51 R21.2 93.41,53.69 Q2.1 | R47.2 20.13,53.69 Q16.1 19.78,55.49 D8.A 17.64,55.49 v17.53,55.37 | v24.13,49.78 JP7.3 24.13,53.43 R39.2 24.2,53.69 Q12.1 23.38,55.13 23.11,54.86 v23.11,54.61 | Q10.1 31.94,53.69 R37.2 32,53.59 v30.99,52.58 | Q14.1 35.5,53.69 R45.2 35.69,53.51 JP5.3 v35.69,49.78 | R60.2 61.78,56.54 Q21.1 61.78,53.02 v61.85,52.96 | 53.79,52.07 53.79,52.77 53.15,53.41 Q18.1 53.15,56.54 R57.2 | 53.79,52.07 Q19.1 53.79,49.63 R58.2 53.85,49.49 v53.85,48.39 | R59.2 57.34,49.63 Q20.1 57.34,51.88 57.15,52.07 | 57.15,52.07 53.79,52.07 | 57.15,52.07 58.92,52.07 v59.81,52.96 | U7.5 21.44,43.88 C18.1 | v16.89,41.02 16.38,40.51 v14.1,40.51 | v12.06,44.83 D12.A | v45.59,60.2 M2.P$2 | C14.1 76.25,35.19 U4.3 76.01,33.82 75.69,33.5 74.42,33.5 74.11,33.82 U4.1 74.03,35.03 v73.28,35.03 72.3,35.03 R67.2 72.14,31.37 72.14,26.92 | R2.1 C2.1 C3.1 v22.86,13.46 | D6.A 28.56,55.49 28.83,55.22 v28.83,53.59 | R9.2 R6.2 76.41,16.51 v76.71,16.51 | C5.1 C4.1 R65.2 C16.1 72.64,26.42 72.14,26.92 | v34.42,47.48 v32.77,47.48 | v65.66,47.5 v67.31,47.5 | v74.04,47.5 v75.56,47.5 | v82.42,47.5 v83.95,47.5 | v92.33,47.5 92.32,47.48 v90.68,47.48 89.52,47.48 88.75,46.72 M21.CD_SW2 | v24.13,47.75 22.35,47.75 19.33,44.73 U7.5
  Top 0.508: D1.A D3.A 27.39,24.11 27.39,24.19 27.88,24.67 27.88,32.32 v27.69,32.51 | JP6.1 v47.73,45.35 v45.59,47.48 45.2,47.48 34.8,37.08 34.8,35.43 v36.32,33.91 36.39,33.85 C9.1 35.03,29.82 34.3,29.1 34.3,13.21 | D4.A 39.24,13.21 | D5.A v52.07,13.21 | 66.8,7.81 74.24,7.81 75.14,8.71 75.14,8.72 J3.1 | 66.8,7.81 S3.4 v52.7,7.81 S3.3 S5.4 S5.3 35.12,7.81 34.3,8.62 34.3,13.21 | 66.8,7.81 66.78,7.83 R18.2 R17.2 66.78,26.96 v66.8,26.99 | R19.2 27.85,34.15 v28.02,33.98 | v39.24,14.61 39.24,13.21 | U1.2 95.2,34.5 v95.25,34.54 | v96.9,39.88 96.98,39.96 M21.P$4 | 39.24,13.21 34.3,13.21 | v71.5,26.99 72.07,26.99 72.14,26.92 | U7.5 19.33,42.83 v19.3,42.8
  Bottom 0.203: v52.07,13.21 46.48,13.21 v46.35,13.34